# Altium PCB broken_sodimm_dq_widths.PcbDoc (part 1 of 7)
Units mm, origin at the board's own origin, x right, y up, seen from the top; angles counter-clockwise.
Board outline 69.63 x 30.03 mm, 8 copper layers (TOP, SPLIT2, S3, VDD4, S5, S6, SPLIT7, BOTTOM), stack 1.2 mm thick; 199 components, 229 nets, 1321 pads, 785 vias.
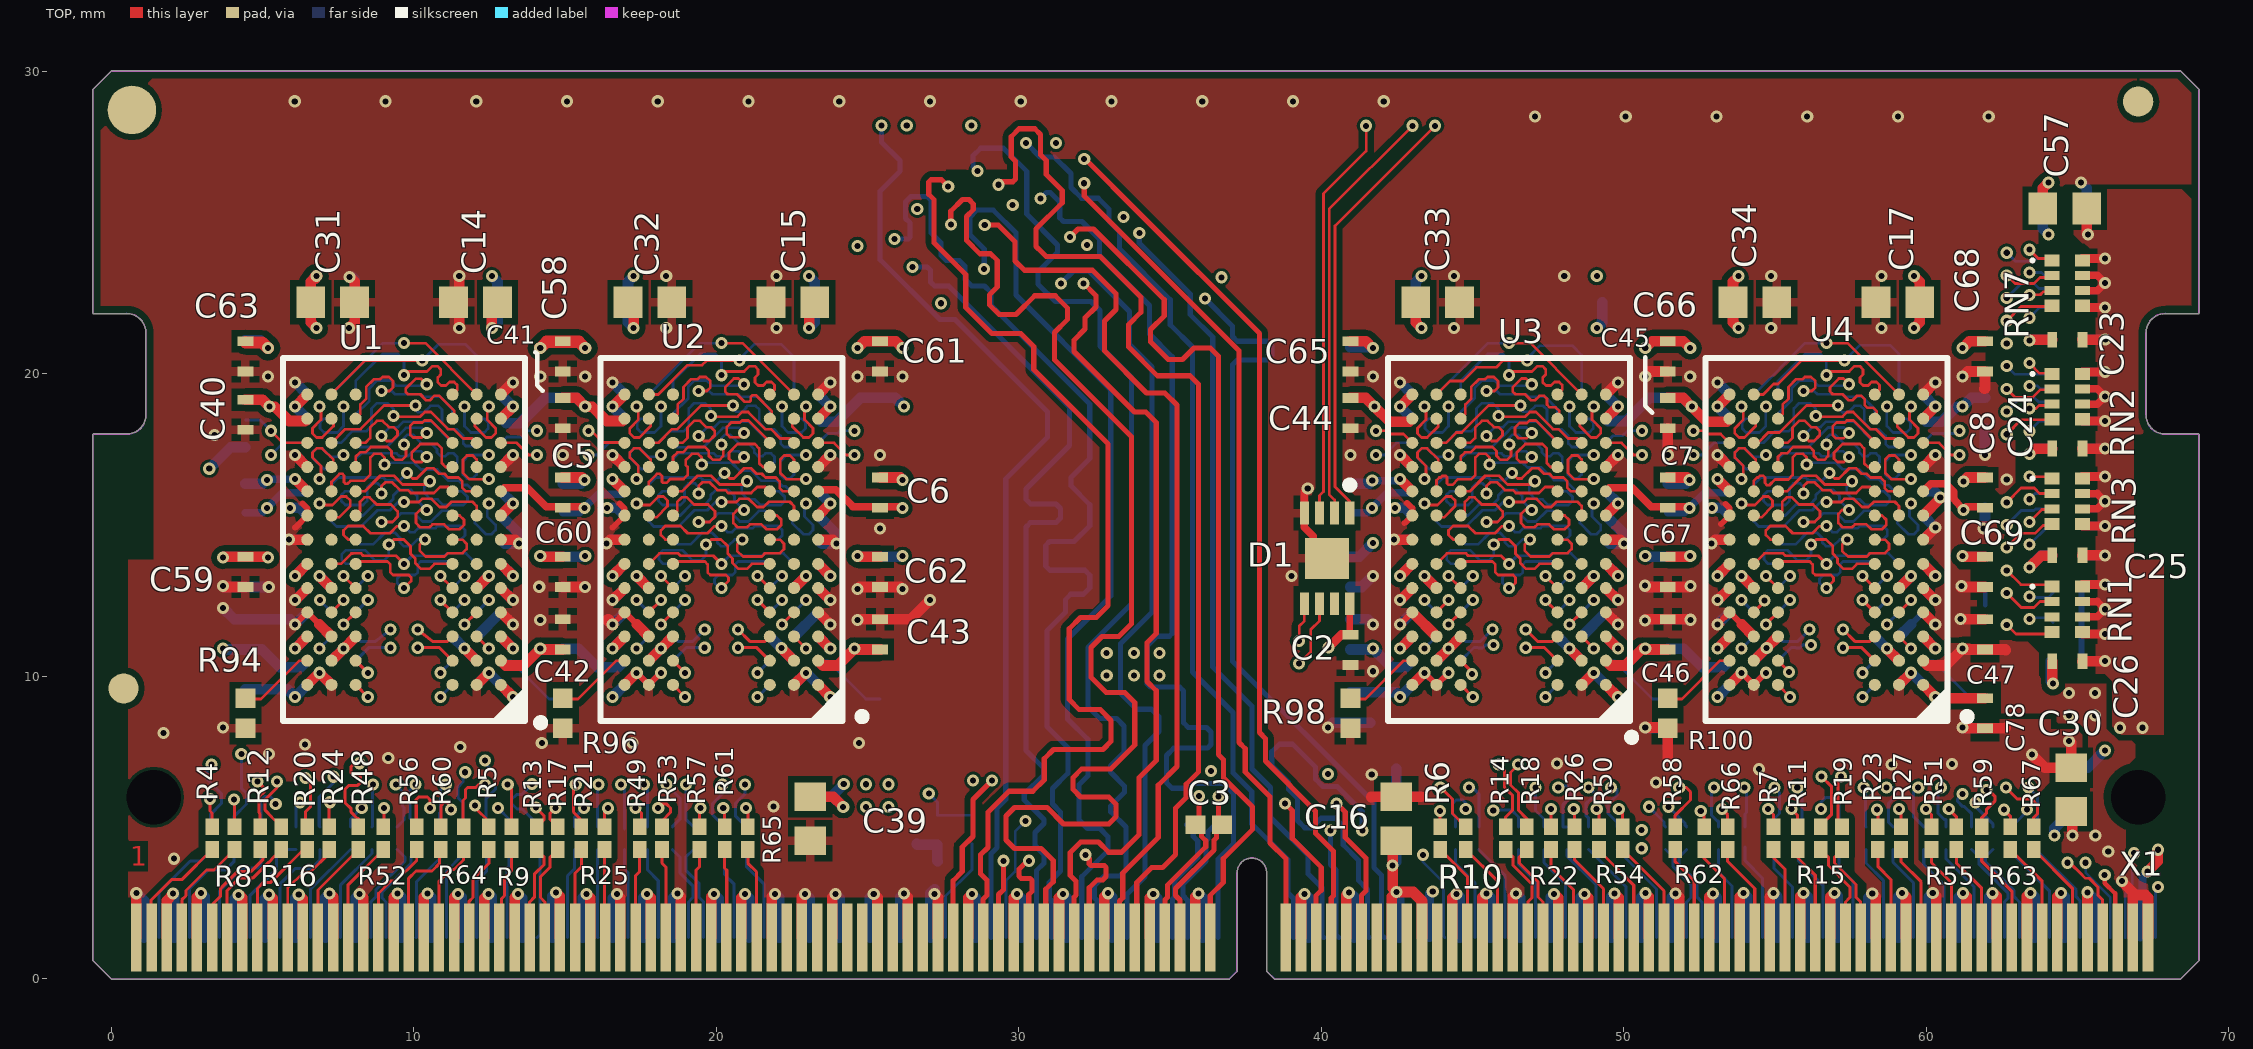
[diagram p0: TOP view]
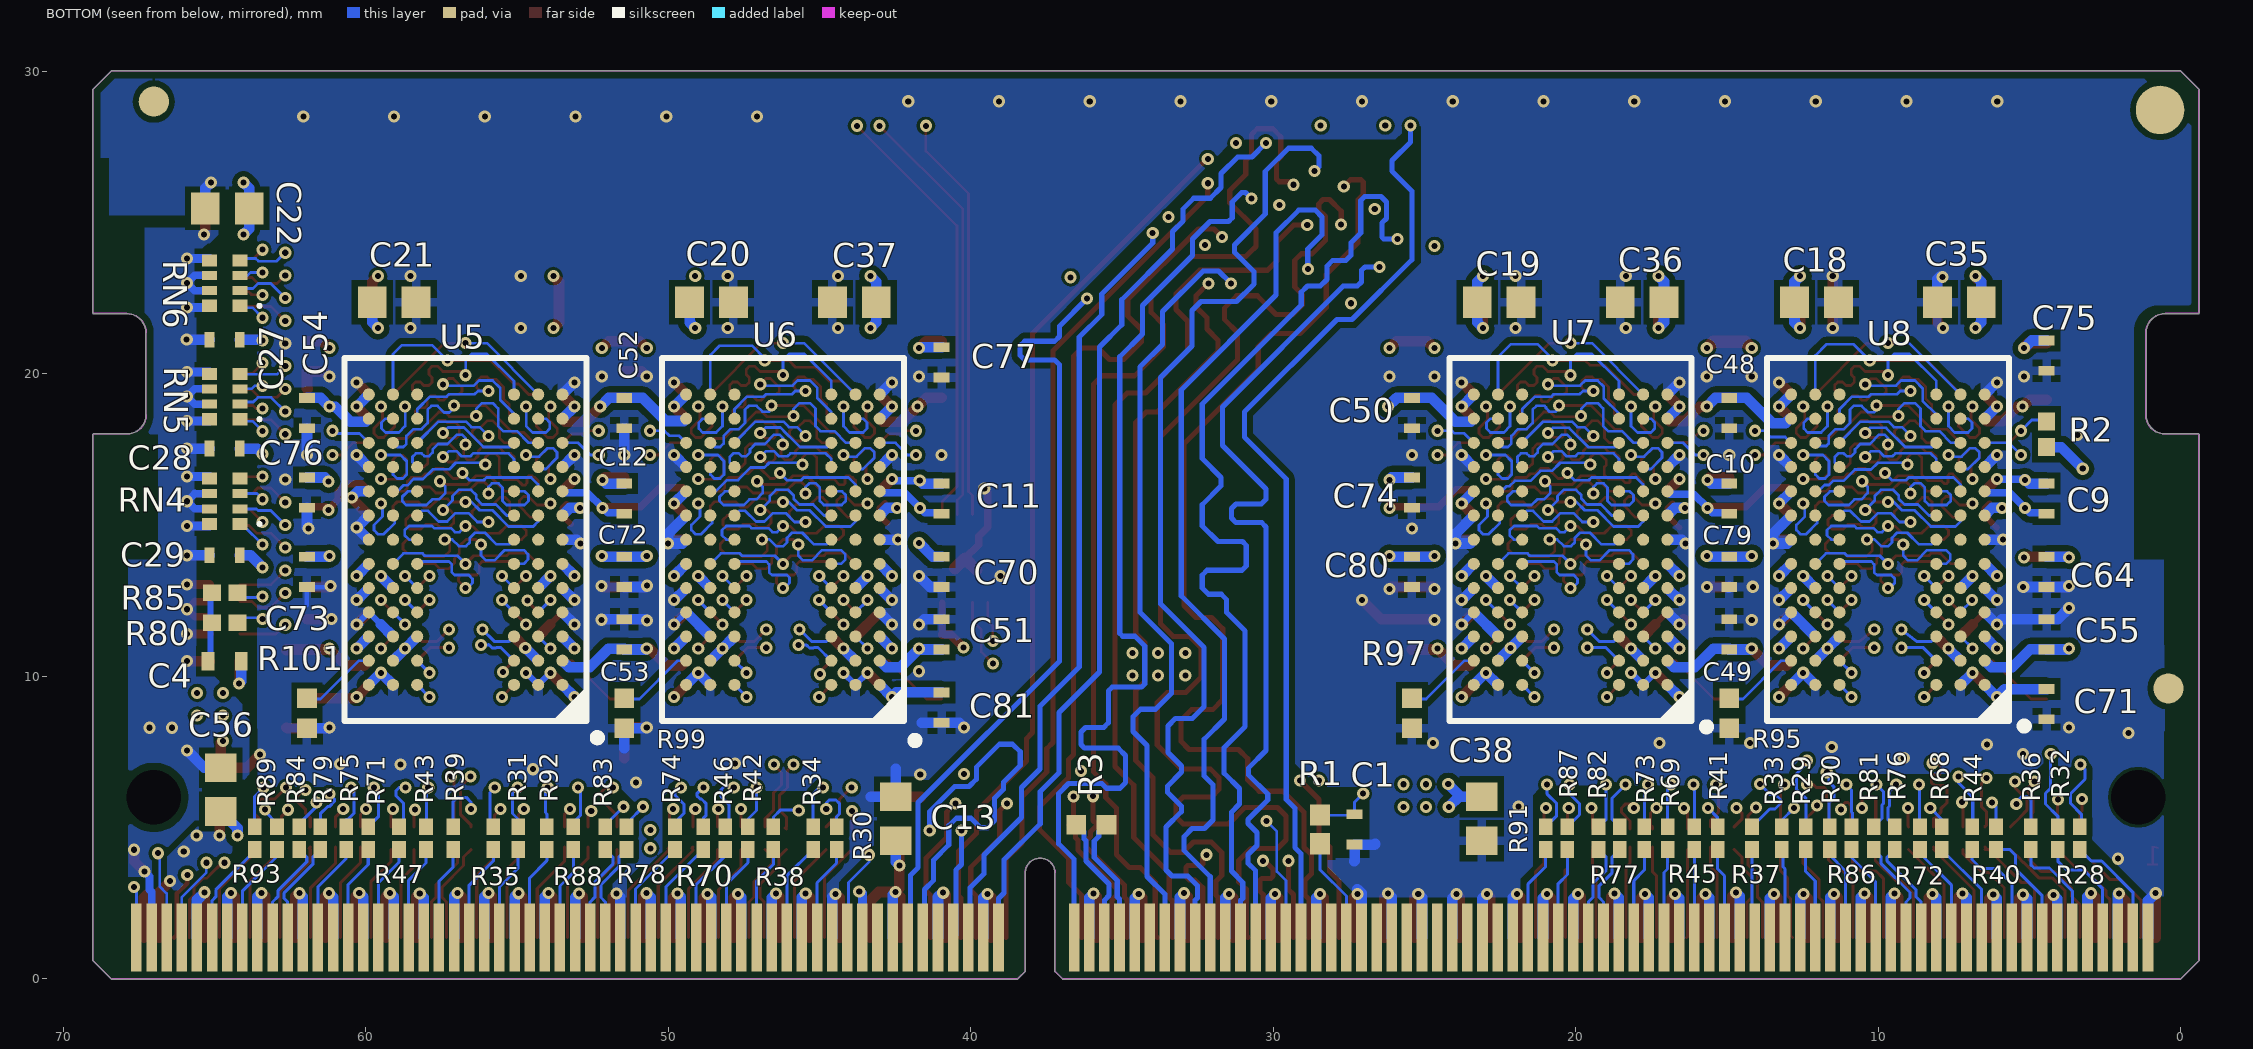
[diagram p1: BOTTOM view, seen from below]
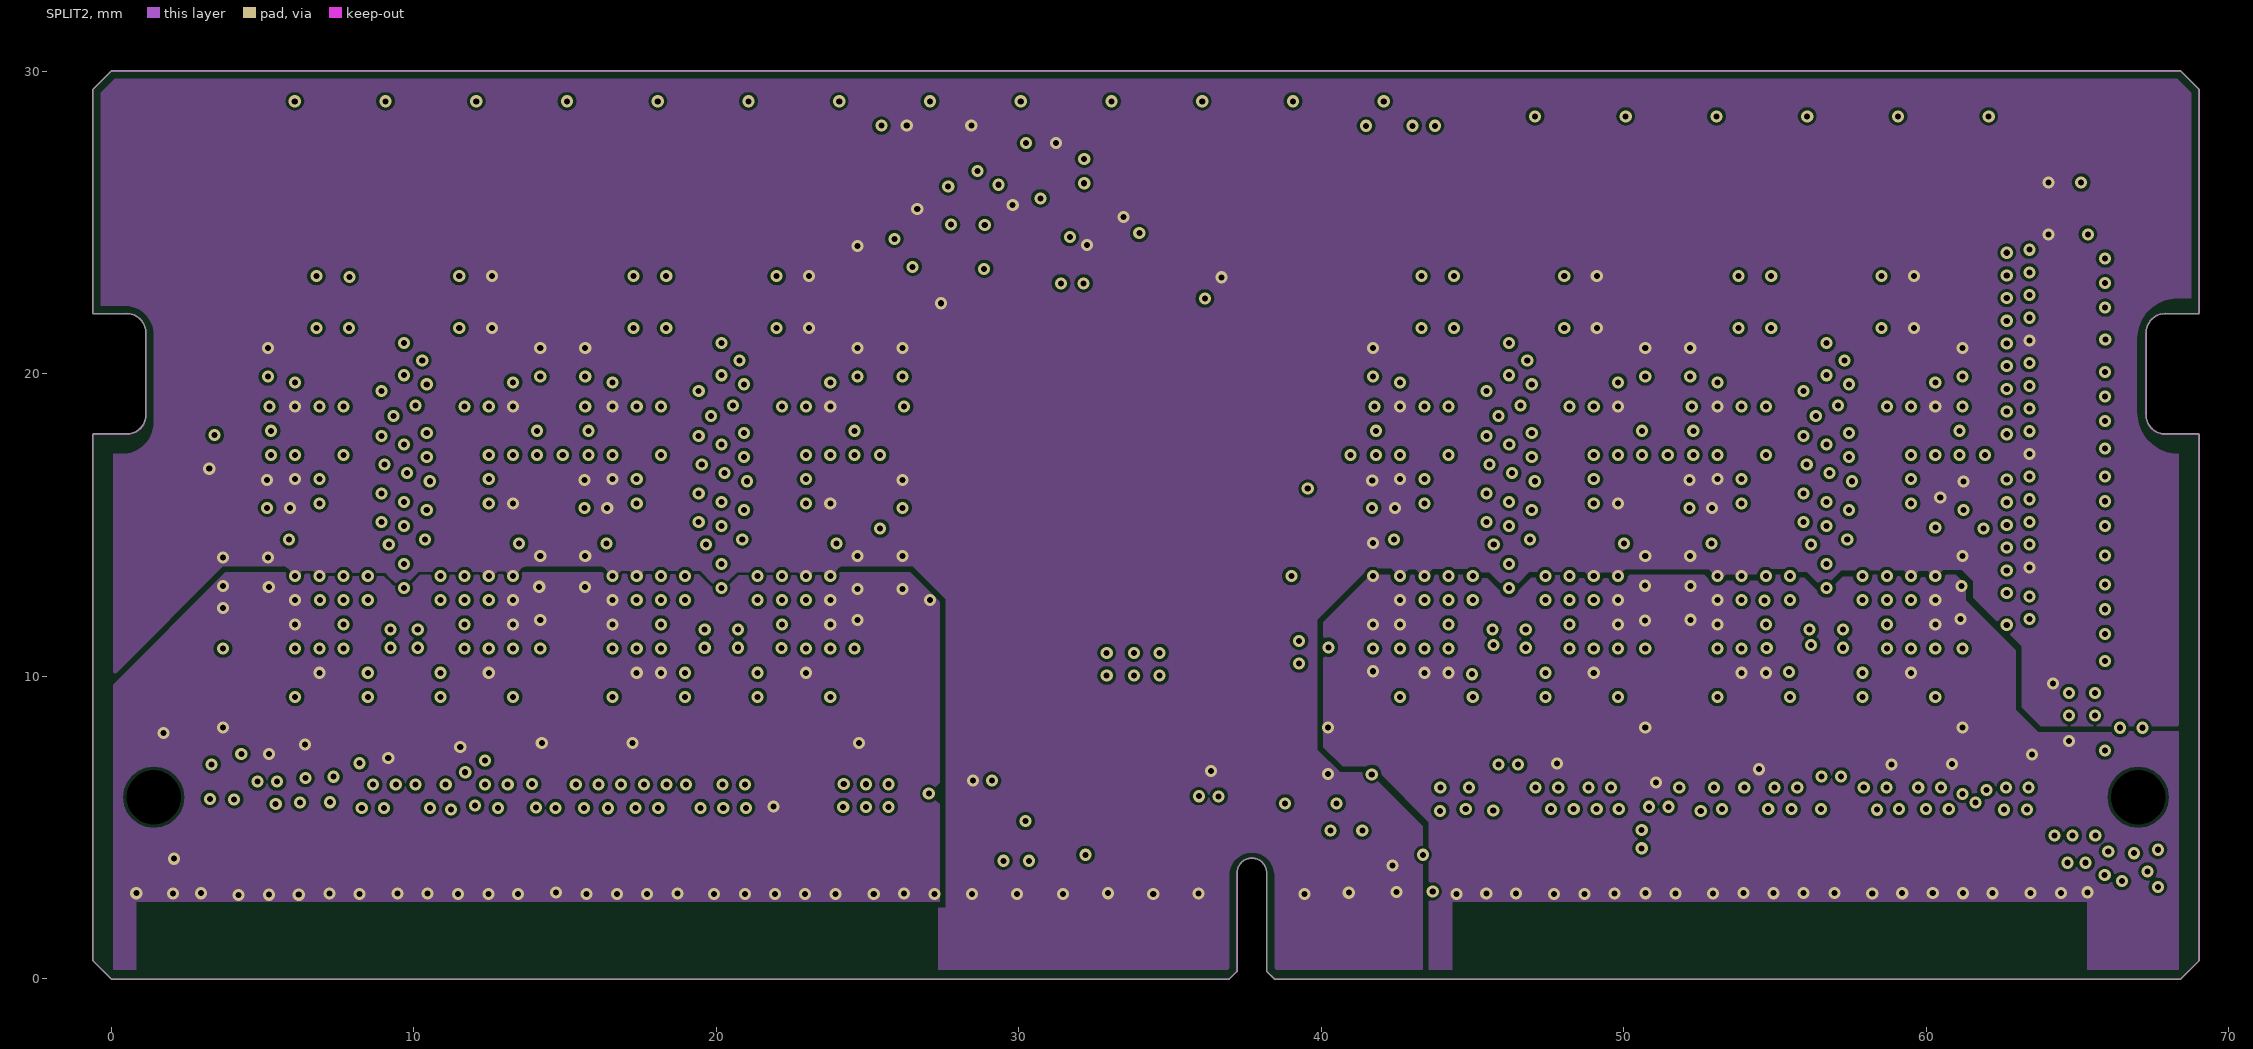
[diagram p2: SPLIT2]
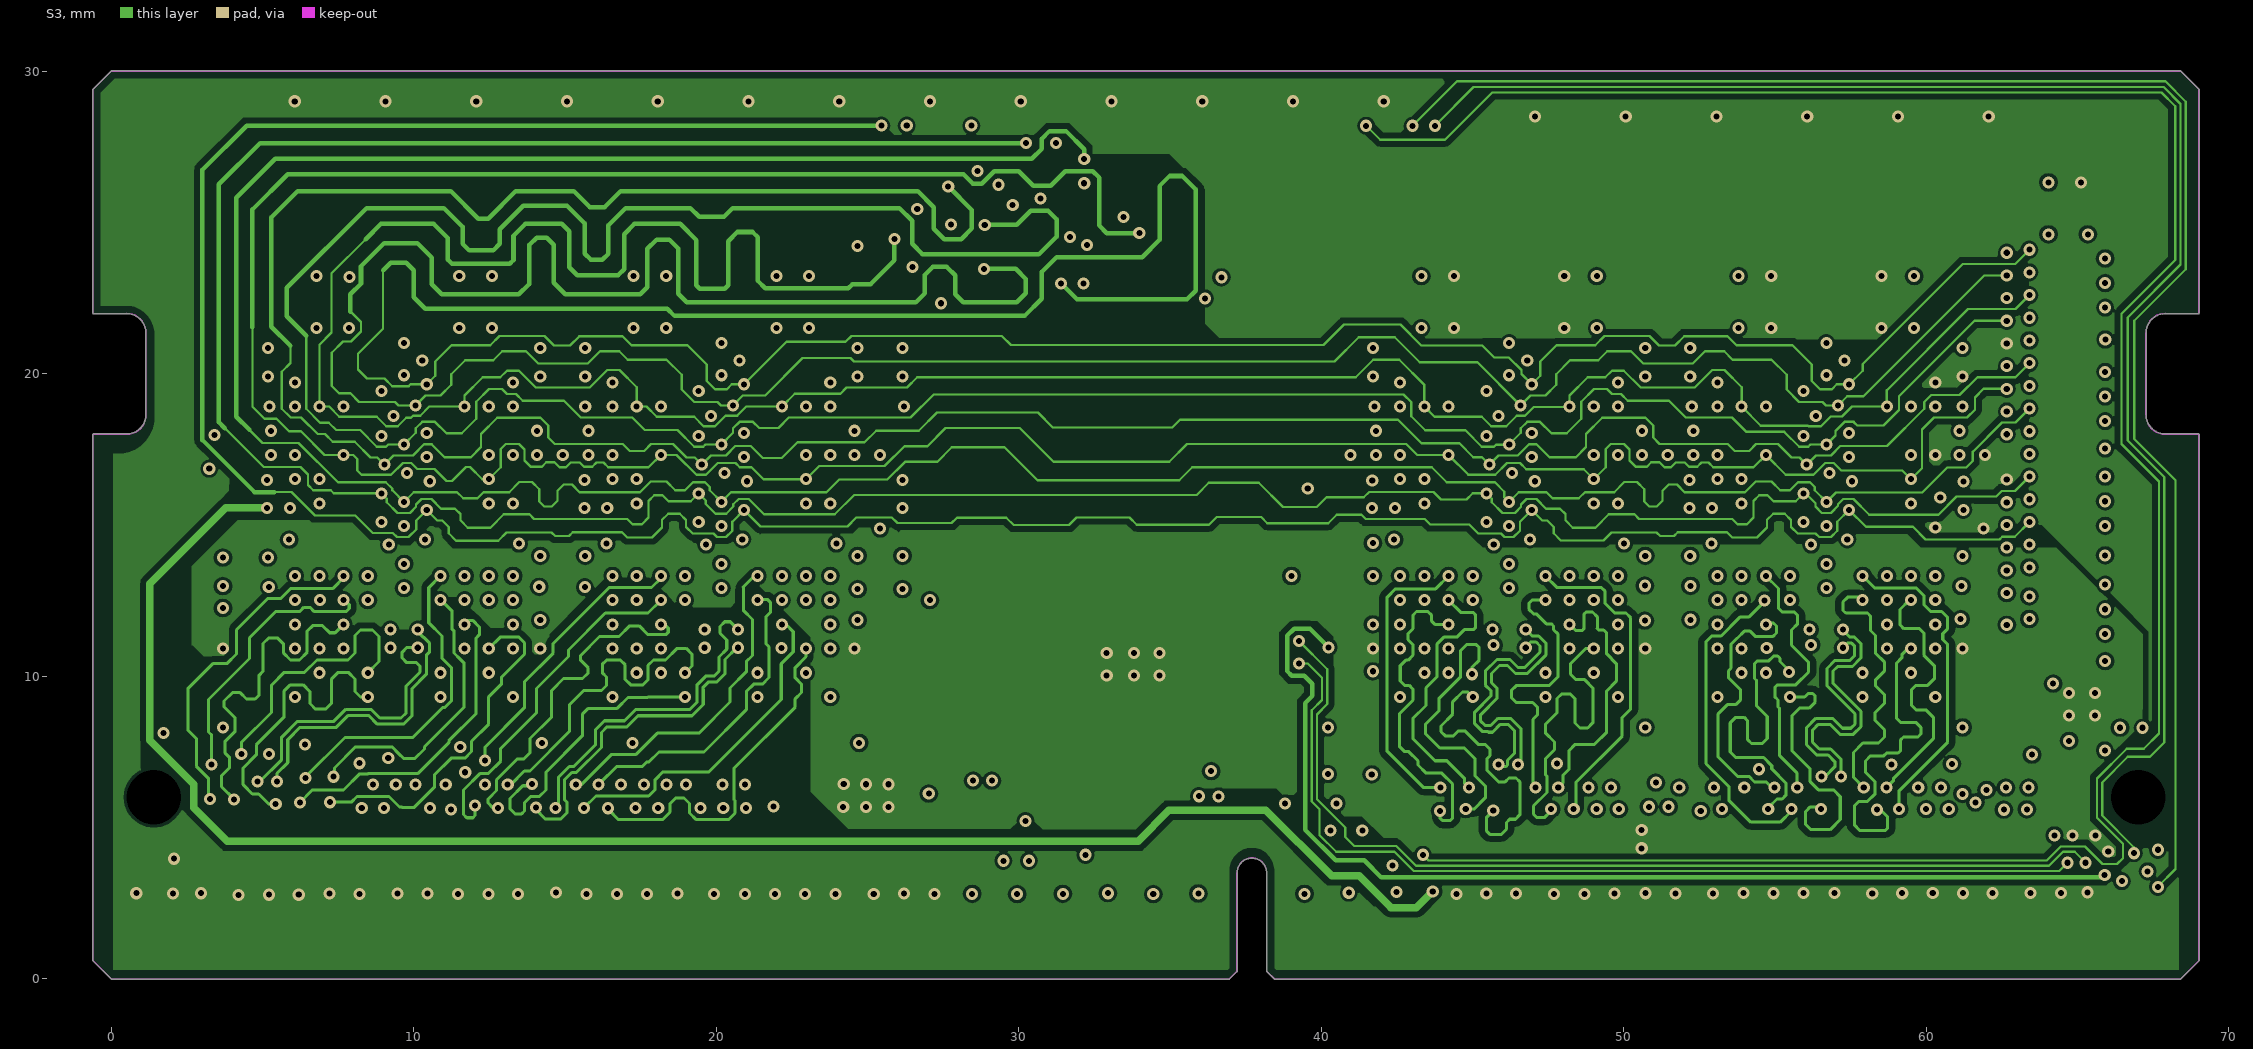
[diagram p3: S3]
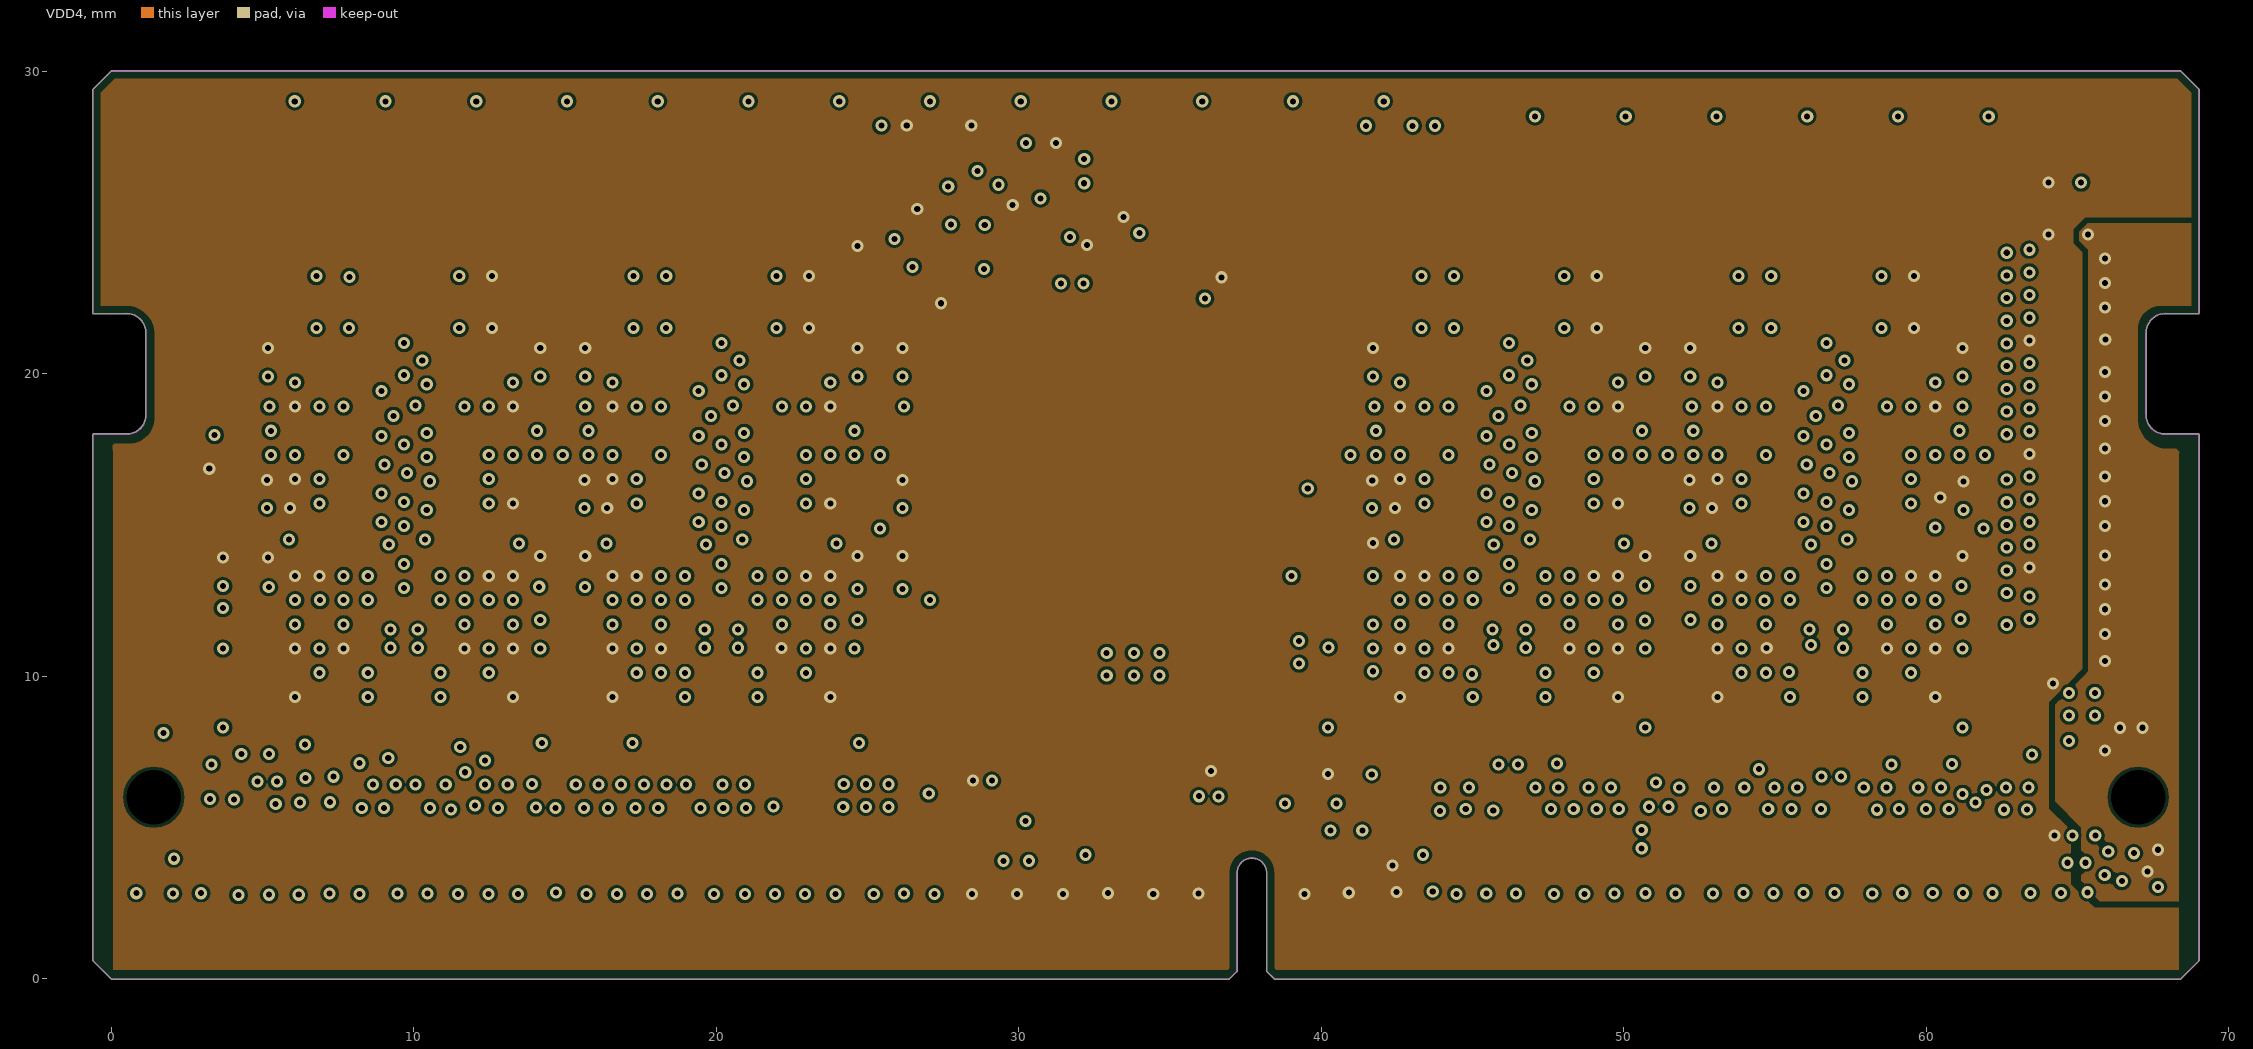
[diagram p4: VDD4]
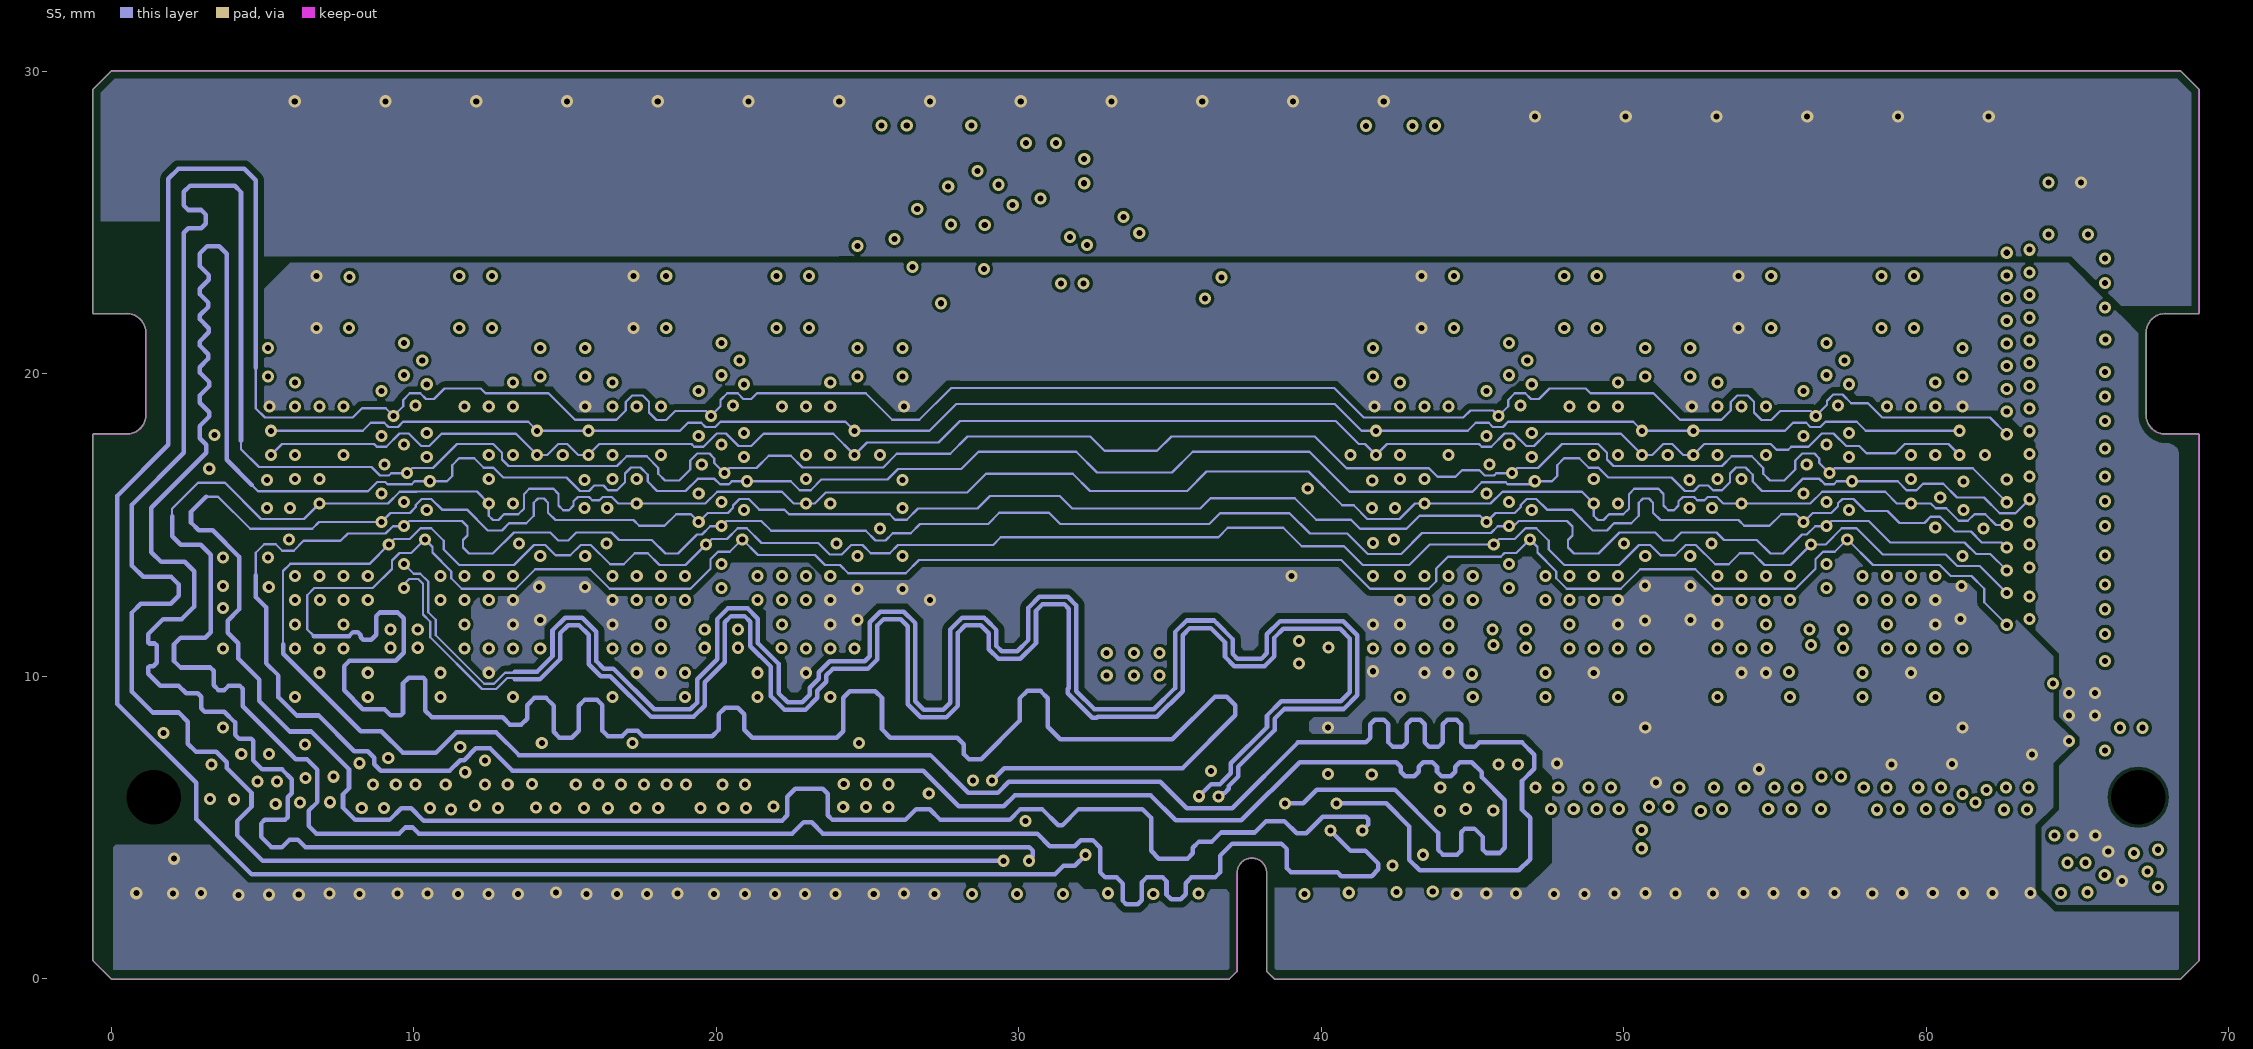
[diagram p5: S5]
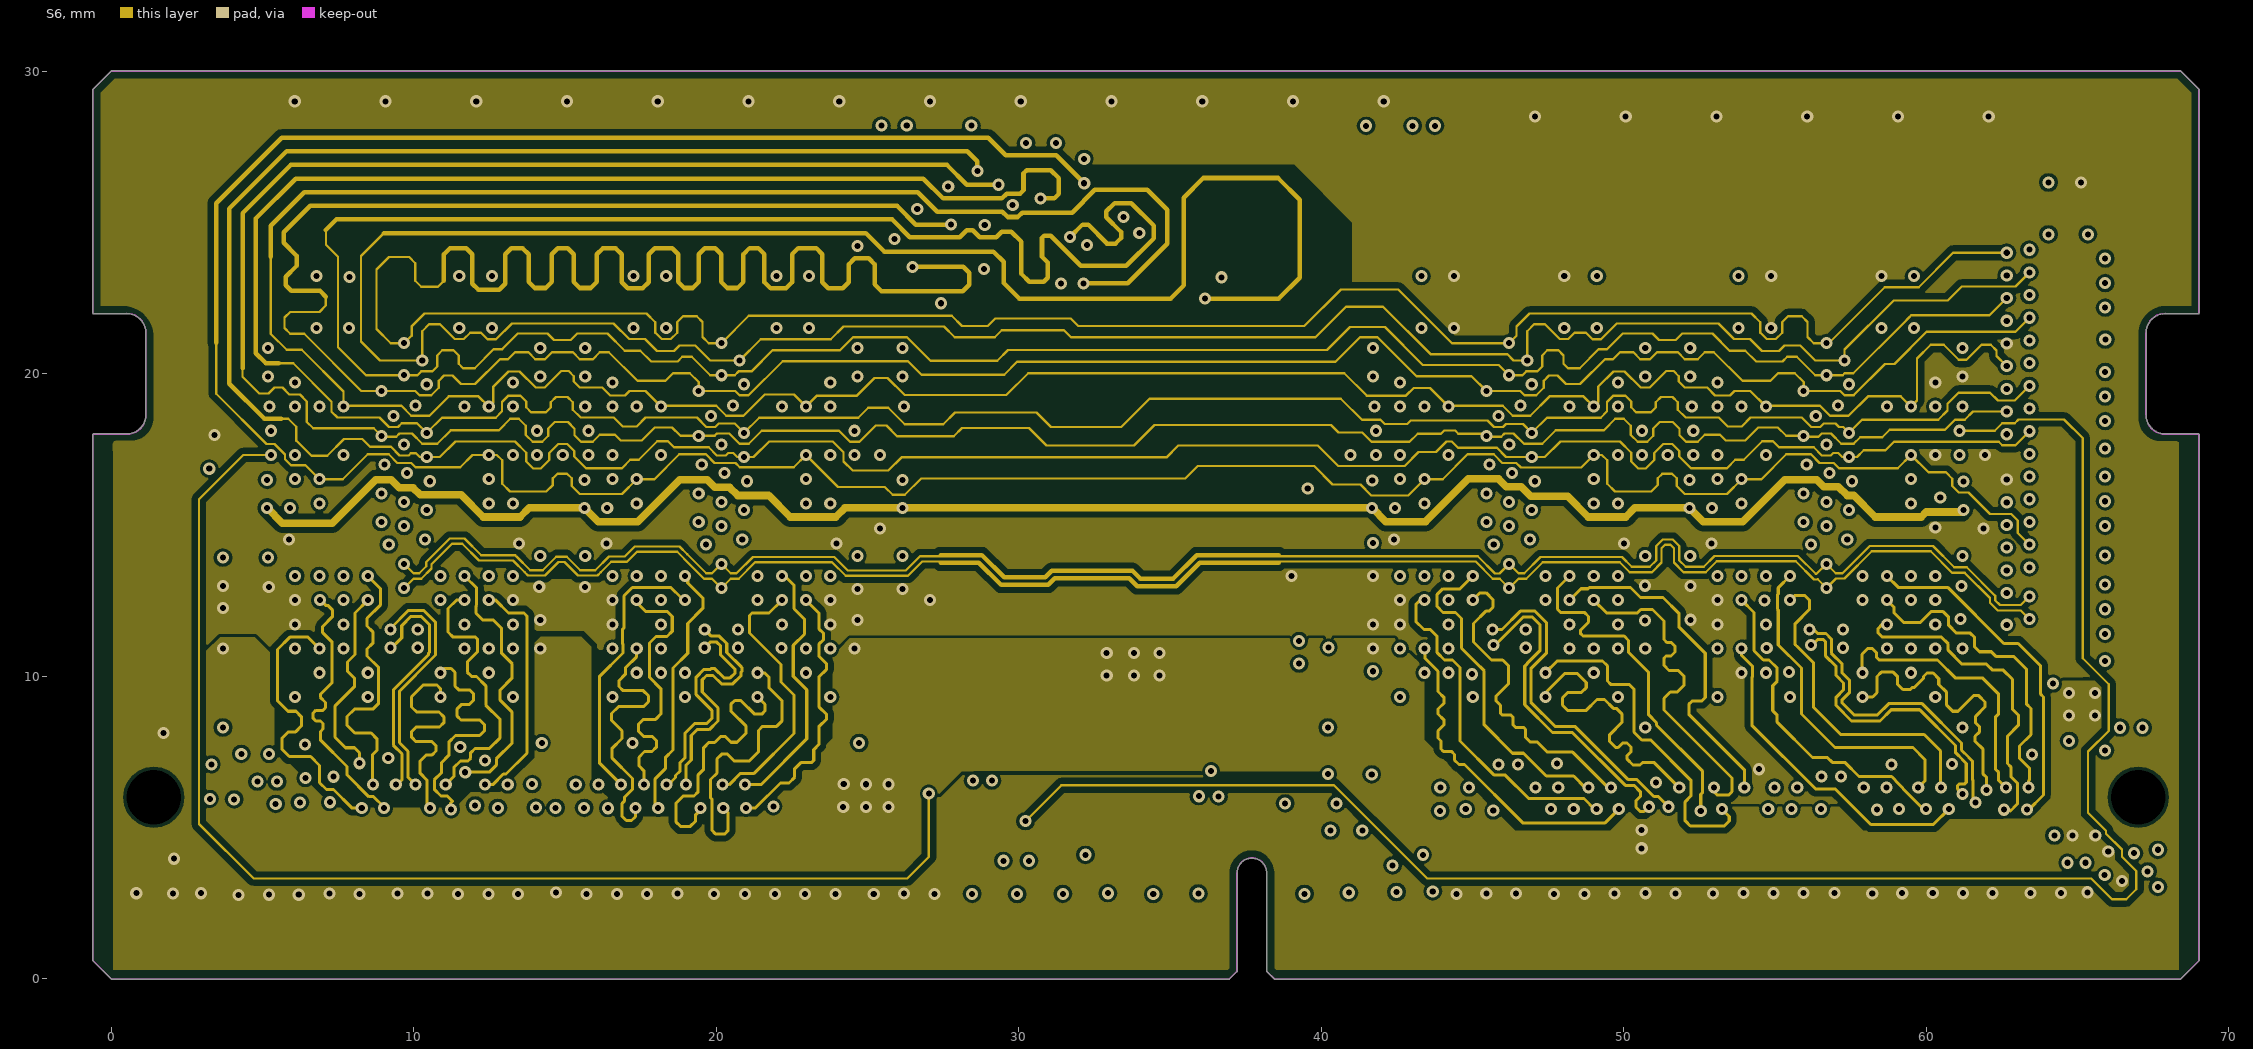
[diagram p6: S6]
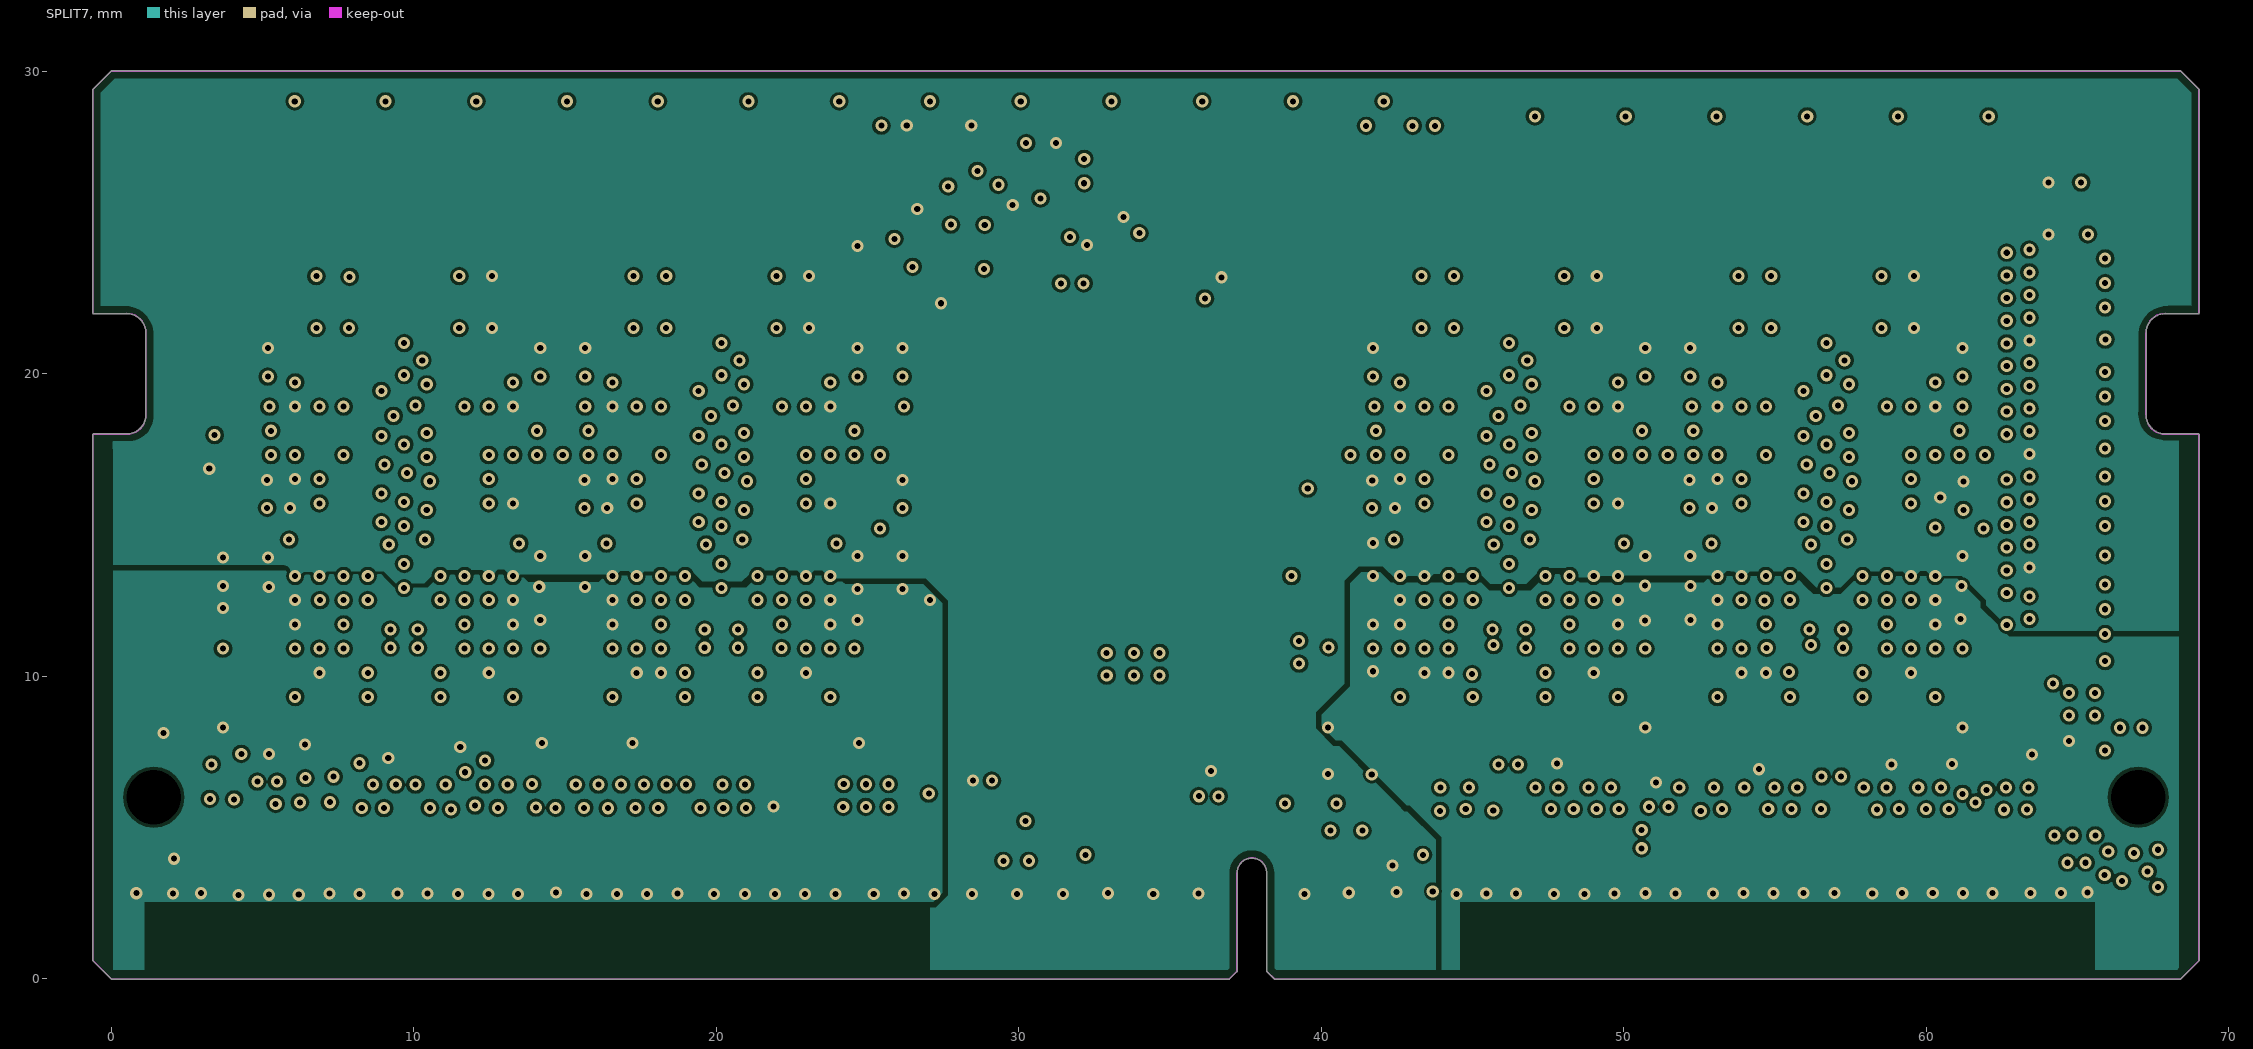
[diagram p7: SPLIT7]
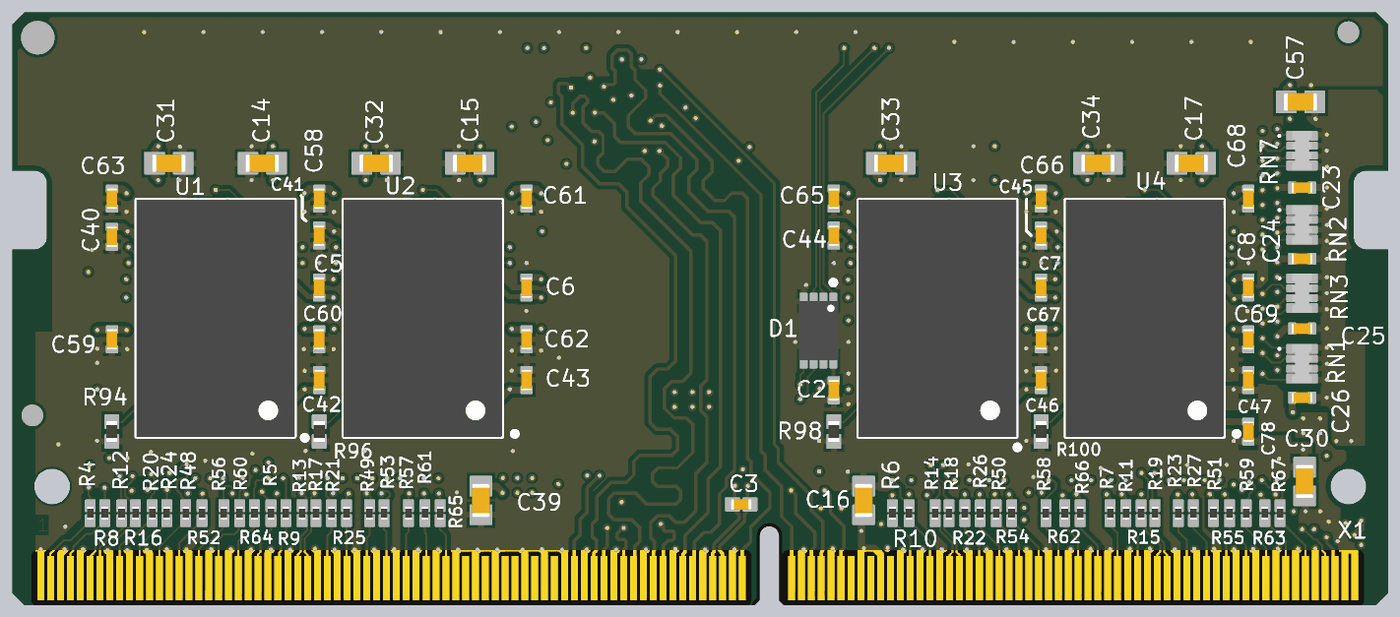
[diagram p13: 3D render of the assembled board from above, using the file's embedded part models]
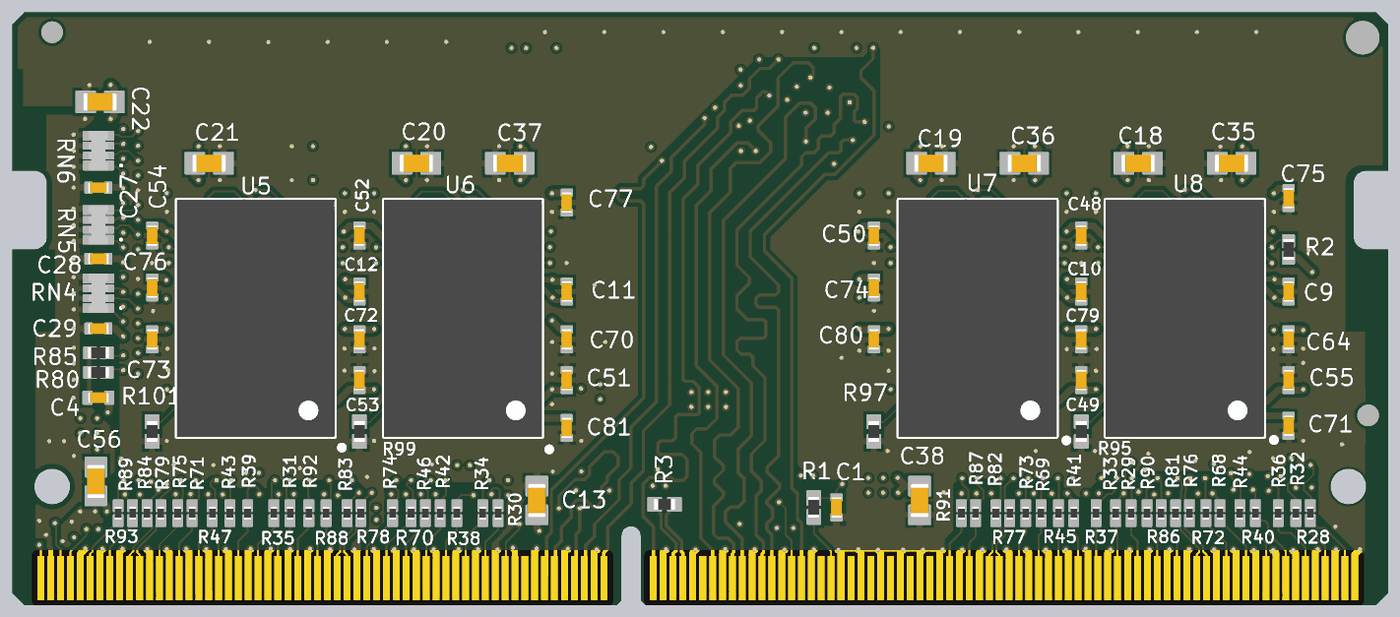
[diagram p14: 3D render of the assembled board from below, using the file's embedded part models]

## Layer stack, top to bottom
Top Solder: solder mask 0.01, Solder Resist, Dk 3.5
TOP: signal copper 0.045
Dielectric 1: core 0.07, FR-4, Dk 4.2
SPLIT2: signal copper 0.015
Dielectric2: core 0.08, FR-4, Dk 4.2
S3: signal copper 0.015
Dielectric3: core 0.32, FR-4, Dk 4.2
VDD4: signal copper 0.015
Dielectric4: core 0.08, FR-4, Dk 4.2
S5: signal copper 0.015
Dielectric5: core 0.32, FR-4, Dk 4.2
S6: signal copper 0.015
Dielectric6: core 0.08, FR-4, Dk 4.2
SPLIT7: signal copper 0.015
Dielectric7: core 0.07, FR-4, Dk 4.2
BOTTOM: signal copper 0.045
Bottom Solder: solder mask 0.01, Solder Resist, Dk 3.5

## Board outline
-0.613,0.6 -0.609,0.591 -0.009,-0.009 0,-0.013 36.95,-0.013 36.959,-0.009 37.209,0.241 37.213,0.25 37.213,3.5 cw(c37.7,3.5) 38.187,3.5 38.187,0.25 38.191,0.241 38.441,-0.009 38.45,-0.013 68.4,-0.013 68.409,-0.009 69.009,0.591 69.013,0.6 69.013,18 69,18.013 67.9,18.013 cw(c67.9,18.65) 67.263,18.65 67.263,21.35 cw(c67.9,21.35) 67.9,21.987 69,21.987 69.013,22 69.013,29.4 69.009,29.409 68.409,30.009 68.4,30.013 0,30.013 -0.009,30.009 -0.609,29.409 -0.613,29.4 -0.613,22 -0.6,21.987 0.5,21.987 cw(c0.5,21.35) 1.137,21.35 1.137,18.65 cw(c0.5,18.65) 0.5,18.013 -0.6,18.013 -0.613,18

## Design rules (kind name [scope] priority, off if disabled: settings)
Clearance Clearance_BL_min [WithinRoom('min0')or WithinRoom('min1')or WithinRoom('min3')or WithinRoom('min4')] p1: gap=0.1 ignorepadtopadclearanceinfootprint=FALSE except(0: Arc-Hole Track-Hole SMDPad-Hole THPad-Hole Via-Hole Fill-Hole Poly-Hole Region-Hole Text-Hole; 0.06: Track-Track; 0.2: Track-Poly SMDPad-Poly)
Clearance Clearance_Control [InNetClass('Control')] p2: gap=0.1 ignorepadtopadclearanceinfootprint=FALSE except(0: Arc-Hole Track-Hole SMDPad-Hole THPad-Hole Via-Hole Fill-Hole Poly-Hole Region-Hole Text-Hole; 0.2: Track-Poly SMDPad-Poly)
Clearance Clearance_BL [(InNetClass('BL0r') or InNetClass('BL1r') or InNetClass('BL2r') or InNetClass('BL3r') or InNetClass('BL4r') or InNetClass('BL5r') or InNetClass('BL6r') or InNetClass('BL7r'))] p3: gap=0.1 ignorepadtopadclearanceinfootprint=FALSE except(0: Arc-Hole Track-Hole SMDPad-Hole THPad-Hole Via-Hole Fill-Hole Poly-Hole Region-Hole Text-Hole; 0.06: Track-Track; 0.2: Track-Poly SMDPad-Poly)
Clearance Clearance_CLK [InNetClass('CLK')] p4: gap=0.1 ignorepadtopadclearanceinfootprint=FALSE except(0: Arc-Hole Track-Hole SMDPad-Hole THPad-Hole Via-Hole Fill-Hole Poly-Hole Region-Hole Text-Hole; 0.2: Track-Poly SMDPad-Poly)
Clearance "Clearance_Address and Comand" [InNetClass('Address and Comand (group1)') or InNetClass('Address and Comand (group2)')] p5: gap=0.1 ignorepadtopadclearanceinfootprint=FALSE except(0: Arc-Hole Track-Hole SMDPad-Hole THPad-Hole Via-Hole Fill-Hole Poly-Hole Region-Hole Text-Hole; 0.2: Track-Poly SMDPad-Poly)
Clearance [All] p6: gap=0.1 ignorepadtopadclearanceinfootprint=FALSE except(0: Arc-Hole Track-Hole SMDPad-Hole THPad-Hole Via-Hole Fill-Hole Poly-Hole Region-Hole Text-Hole; 0.2: Track-Poly SMDPad-Poly)
ComponentClearance [All] p1: gap=0.1 collisioncheckmode=3 verticalgap=0.1 showdistances=FALSE
DiffPairsRouting DiffPairsRouting_CKL [InDifferentialPairClass('CLK')] p1: maxlimit=0.1 minlimit=0.1 mostfreqgap=0.1 toplayer_minwidth=0.09 toplayer_maxwidth=0.17 toplayer_prefwidth=0.17 midlayer1_minwidth=0.075 midlayer1_maxwidth=0.17 midlayer1_prefwidth=0.15 midlayer2_minwidth=0.075 midlayer2_maxwidth=0.17 midlayer2_prefwidth=0.15 midlayer3_minwidth=0.075 midlayer3_maxwidth=0.17 midlayer3_prefwidth=0.15 midlayer4_minwidth=0.075 midlayer4_maxwidth=0.17 midlayer4_prefwidth=0.15 midlayer5_minwidth=0.075 midlayer5_maxwidth=0.17 midlayer5_prefwidth=0.15 midlayer6_minwidth=0.075 midlayer6_maxwidth=0.17 midlayer6_prefwidth=0.15 bottomlayer_minwidth=0.09 bottomlayer_maxwidth=0.17 bottomlayer_prefwidth=0.17 maxuncoupledlength=12.7
DiffPairsRouting DiffPairsRouting_DQS [InDifferentialPairClass('DQS')] p2: maxlimit=0.254 minlimit=0.1 mostfreqgap=0.1 toplayer_minwidth=0.1 toplayer_maxwidth=0.381 toplayer_prefwidth=0.1 midlayer1_minwidth=0.1 midlayer1_maxwidth=0.381 midlayer1_prefwidth=0.1 midlayer2_minwidth=0.1 midlayer2_maxwidth=0.381 midlayer2_prefwidth=0.1 midlayer3_minwidth=0.1 midlayer3_maxwidth=0.381 midlayer3_prefwidth=0.1 midlayer4_minwidth=0.1 midlayer4_maxwidth=0.381 midlayer4_prefwidth=0.1 midlayer5_minwidth=0.1 midlayer5_maxwidth=0.381 midlayer5_prefwidth=0.1 midlayer6_minwidth=0.1 midlayer6_maxwidth=0.381 midlayer6_prefwidth=0.1 bottomlayer_minwidth=0.1 bottomlayer_maxwidth=0.381 bottomlayer_prefwidth=0.1 maxuncoupledlength=12.7
MatchedLengths MatchedLengths_BL0 [InxSignalClass('xSignals_BL0')] p1: tolerance=0.1 checknetsindiffpair=FALSE checkdiffpairvsdiffpair=TRUE checkxsignals=TRUE checkothers=TRUE
MatchedLengths MatchedLengths_BL1 [InxSignalClass('xSignals_BL1')] p2: tolerance=0.1 checknetsindiffpair=FALSE checkdiffpairvsdiffpair=TRUE checkxsignals=TRUE checkothers=TRUE
MatchedLengths MatchedLengths_BL2 [InxSignalClass('xSignals_BL2')] p3: tolerance=0.1 checknetsindiffpair=FALSE checkdiffpairvsdiffpair=TRUE checkxsignals=TRUE checkothers=TRUE
MatchedLengths MatchedLengths_BL3 [InxSignalClass('xSignals_BL3')] p4: tolerance=0.1 checknetsindiffpair=FALSE checkdiffpairvsdiffpair=TRUE checkxsignals=TRUE checkothers=TRUE
MatchedLengths MatchedLengths_BL4 [InxSignalClass('xSignals_BL4')] p5: tolerance=0.1 checknetsindiffpair=FALSE checkdiffpairvsdiffpair=TRUE checkxsignals=TRUE checkothers=TRUE
MatchedLengths MatchedLengths_BL5 [InxSignalClass('xSignals_BL5')] p6: tolerance=0.1 checknetsindiffpair=FALSE checkdiffpairvsdiffpair=TRUE checkxsignals=TRUE checkothers=TRUE
MatchedLengths MatchedLengths_BL6 [InxSignalClass('xSignals_BL6')] p7: tolerance=0.1 checknetsindiffpair=FALSE checkdiffpairvsdiffpair=TRUE checkxsignals=TRUE checkothers=TRUE
MatchedLengths MatchedLengths_BL7 [InxSignalClass('xSignals_BL7')] p8: tolerance=0.1 checknetsindiffpair=FALSE checkdiffpairvsdiffpair=TRUE checkxsignals=TRUE checkothers=TRUE
MatchedLengths "MatchedLengths_Address and Comand (group2)_U9" [(InxSignalClass('xSignals_Address and Comand (group2)_P1_U9'))] p9: tolerance=1.5 checknetsindiffpair=FALSE checkdiffpairvsdiffpair=TRUE checkxsignals=TRUE checkothers=TRUE
MatchedLengths "MatchedLengths_Address and Comand (group2)_U1" [(InxSignalClass('xSignals_Address and Comand (group2)_P1_U1'))] p10: tolerance=1.5 checknetsindiffpair=FALSE checkdiffpairvsdiffpair=TRUE checkxsignals=TRUE checkothers=TRUE
MatchedLengths "MatchedLengths_Address and Comand (group2)_U2" [(InxSignalClass('xSignals_Address and Comand (group2)_P1_U2'))] p11: tolerance=1.5 checknetsindiffpair=FALSE checkdiffpairvsdiffpair=TRUE checkxsignals=TRUE checkothers=TRUE
MatchedLengths "MatchedLengths_Address and Comand (group2)_U8" [(InxSignalClass('xSignals_Address and Comand (group2)_P1_U8'))] p12: tolerance=1.5 checknetsindiffpair=FALSE checkdiffpairvsdiffpair=TRUE checkxsignals=TRUE checkothers=TRUE
MatchedLengths "MatchedLengths_Address and Comand (group2)_U7" [(InxSignalClass('xSignals_Address and Comand (group2)_P1_U7'))] p13: tolerance=1.5 checknetsindiffpair=FALSE checkdiffpairvsdiffpair=TRUE checkxsignals=TRUE checkothers=TRUE
MatchedLengths "MatchedLengths_Address and Comand (group2)_U4" [(InxSignalClass('xSignals_Address and Comand (group2)_P1_U4'))] p14: tolerance=1.5 checknetsindiffpair=FALSE checkdiffpairvsdiffpair=TRUE checkxsignals=TRUE checkothers=TRUE
MatchedLengths "MatchedLengths_Address and Comand (group2)_U6" [(InxSignalClass('xSignals_Address and Comand (group2)_P1_U6'))] p15: tolerance=1.5 checknetsindiffpair=FALSE checkdiffpairvsdiffpair=TRUE checkxsignals=TRUE checkothers=TRUE
MatchedLengths "MatchedLengths_Address and Comand (group2)_U5" [(InxSignalClass('xSignals_Address and Comand (group2)_P1_U5'))] p16: tolerance=1.5 checknetsindiffpair=FALSE checkdiffpairvsdiffpair=TRUE checkxsignals=TRUE checkothers=TRUE
MatchedLengths "MatchedLengths_Address and Comand (group1)_P1_U9" [(InxSignalClass('xSignals_Address and Comand (group1)_P1_U9')) or (InxSignalClass('xSignals_Control (group1)_P1_U9')) or (InxSignalClass('xSignals_CLK (group1)_P1_U9'))] p17: tolerance=0.03 checknetsindiffpair=FALSE checkdiffpairvsdiffpair=TRUE checkxsignals=TRUE checkothers=TRUE
MatchedLengths "MatchedLengths_Address and Comand (group1)_P1_U4" [(InxSignalClass('xSignals_Address and Comand (group1)_P1_U4')) or (InxSignalClass('xSignals_Control (group1)_P1_U4')) or (InxSignalClass('xSignals_CLK (group1)_P1_U4'))] p18: tolerance=2 checknetsindiffpair=FALSE checkdiffpairvsdiffpair=TRUE checkxsignals=TRUE checkothers=TRUE
MatchedLengths "MatchedLengths_Address and Comand (group1)_P1_U7" [(InxSignalClass('xSignals_Address and Comand (group1)_P1_U7')) or (InxSignalClass('xSignals_Control (group1)_P1_U7')) or (InxSignalClass('xSignals_CLK (group1)_P1_U7'))] p19: tolerance=0.03 checknetsindiffpair=FALSE checkdiffpairvsdiffpair=TRUE checkxsignals=TRUE checkothers=TRUE
MatchedLengths "MatchedLengths_Address and Comand (group1)_P1_U5" [(InxSignalClass('xSignals_Address and Comand (group1)_P1_U5')) or (InxSignalClass('xSignals_Control (group1)_P1_U5')) or (InxSignalClass('xSignals_CLK (group1)_P1_U5'))] p20: tolerance=2 checknetsindiffpair=FALSE checkdiffpairvsdiffpair=TRUE checkxsignals=TRUE checkothers=TRUE
MatchedLengths "MatchedLengths_Address and Comand (group1)_P1_U6" [(InxSignalClass('xSignals_Address and Comand (group1)_P1_U6')) or (InxSignalClass('xSignals_Control (group1)_P1_U6')) or (InxSignalClass('xSignals_CLK (group1)_P1_U6'))] p21: tolerance=0.03 checknetsindiffpair=FALSE checkdiffpairvsdiffpair=TRUE checkxsignals=TRUE checkothers=TRUE
MatchedLengths "MatchedLengths_Address and Comand (group1)_P1_U8" [(InxSignalClass('xSignals_Address and Comand (group1)_P1_U8')) or (InxSignalClass('xSignals_Control (group1)_P1_U8')) or (InxSignalClass('xSignals_CLK (group1)_P1_U8'))] p22: tolerance=0.03 checknetsindiffpair=FALSE checkdiffpairvsdiffpair=TRUE checkxsignals=TRUE checkothers=TRUE
MatchedLengths "MatchedLengths_Address and Comand (group1)_P1_U2" [(InxSignalClass('xSignals_Address and Comand (group1)_P1_U2')) or (InxSignalClass('xSignals_Control (group1)_P1_U2')) or (InxSignalClass('xSignals_CLK (group1)_P1_U2'))] p23: tolerance=2 checknetsindiffpair=FALSE checkdiffpairvsdiffpair=TRUE checkxsignals=TRUE checkothers=TRUE
MatchedLengths "MatchedLengths_Address and Comand (group1)_P1_U1" [(InxSignalClass('xSignals_Address and Comand (group1)_P1_U1')) or (InxSignalClass('xSignals_Control (group1)_P1_U1')) or (InxSignalClass('xSignals_CLK (group1)_P1_U1'))] p24: tolerance=2 checknetsindiffpair=FALSE checkdiffpairvsdiffpair=TRUE checkxsignals=TRUE checkothers=TRUE
MinimumSolderMaskSliver [All] p1: minsoldermaskwidth=0.05
PasteMaskExpansion [All] p1: expansion=0.05
PlaneClearance [All] p1: clearance=0.3
PlaneConnect [InNetClass('Power')] p1: planeconnectstyle=Relief reliefexpansion=0 reliefentries=4 reliefconductorwidth=0.3 reliefairgap=0.2
PolygonConnect Pad [IsPad And InAnyComponent] p1: connectstyle=Relief reliefconductorwidth=0.3 reliefentries=4 polygonreliefangle="90 Angle" airgapwidth=0.2
PolygonConnect all [All] p2: connectstyle=Direct reliefconductorwidth=0.254 reliefentries=4 polygonreliefangle="90 Angle" airgapwidth=0.254
RoutingVias [All] p1: holewidth=0.2 width=0.4 viastyle="Through Hole" minholewidth=0.2 minwidth=0.4 maxholewidth=0.2 maxwidth=0.4
SilkToSilkClearance [All] p1: silktosilkclearance=0.1
SilkToSolderMaskClearance [IsPad] p1: minsilkscreentomaskgap=0.05 clearancetoexposedcopper=FALSE
SolderMaskExpansion [All] p1: expansion=0.05 istentingtop=FALSE
Width Width_POWER [InNetClass('Power')] p1: maxlimit=0.4 minlimit=0.15 preferedwidth=0.35
Width "Width_Address and Comand" [InNetClass('Address and Comand (group1)') or InNetClass('Control')] p2: maxlimit=0.17 minlimit=0.075 preferedwidth=0.15 toplayer_minwidth=0.09 toplayer_prefwidth=0.17 bottomlayer_minwidth=0.09 bottomlayer_prefwidth=0.17 minimp=50.000000 maximp=50.000000 favimp=50.000000
Width Width_DQ [InNetClass('DQ')] p3: maxlimit=0.203 minlimit=0.165 preferedwidth=0.178
22 further rules are at their usual default settings.

## Classes and differential pairs
net class "Address and Command (group2)": A07 A08 A16 BA0 BA1
component class "Components Class 3": C4 C17 C29 C37 C46 C58 C67 C72
component class "Components Class 2": R1 R27 R33 R55 R59 R81 R84 R92
net class DQ: DM0 DM0R DM1 DM1R DM2 DM2R DM3 DM3R DM4 DM4R DM5 DM5R DM6 DM6R DM7 DM7R DQ00 DQ00R DQ01 DQ01R DQ02 DQ02R DQ03 DQ03R DQ04 DQ04R DQ05 DQ05R DQ06 DQ06R DQ07 DQ07R DQ08 DQ08R DQ09 DQ09R DQ10 DQ10R DQ11 DQ11R DQ12 DQ12R DQ13 DQ13R DQ14 DQ14R DQ15 DQ15R DQ16 DQ16R DQ17 DQ17R DQ18 DQ18R DQ19 DQ19R DQ20 DQ20R DQ21 DQ21R DQ22 DQ22R DQ23 DQ23R DQ24 DQ24R DQ25 DQ25R DQ26 DQ26R DQ27 DQ27R DQ28 DQ28R DQ29 DQ29R DQ30 DQ30R DQ31 DQ31R DQ32 DQ32R DQ33 DQ33R DQ34 DQ34R DQ35 DQ35R DQ36 DQ36R DQ37 DQ37R DQ38 DQ38R DQ39 DQ39R DQ40 DQ40R DQ41 DQ41R DQ42 DQ42R DQ43 DQ43R DQ44 DQ44R DQ45 DQ45R DQ46 DQ46R DQ47 DQ47R DQ48 DQ48R DQ49 DQ49R DQ50 DQ50R DQ51 DQ51R DQ52 DQ52R DQ53 DQ53R DQ54 DQ54R DQ55 DQ55R DQ56 DQ56R DQ57 DQ57R DQ58 DQ58R DQ59 DQ59R DQ60 DQ60R DQ61 DQ61R DQ62 DQ62R DQ63 DQ63R DQS0_N DQS0_P DQS0R_N DQS0R_P DQS1_N DQS1_P DQS1R_N DQS1R_P DQS2_N DQS2_P DQS2R_N DQS2R_P DQS3_N DQS3_P DQS3R_N DQS3R_P DQS4_N DQS4_P DQS4R_N DQS4R_P DQS5_N DQS5_P DQS5R_N DQS5R_P DQS6_N DQS6_P DQS6R_N DQS6R_P DQS7_N DQS7_P DQS7R_N DQS7R_P
differential pair class DQS: DQS0 DQS0R DQS1 DQS1R DQS2 DQS2R DQS3 DQS3R DQS4 DQS4R DQS5 DQS5R DQS6 DQS6R DQS7 DQS7R
net class Control: CKE0 ODT0 S0
net class CLK: CK0_N CK0_P
net class "Address and Command (group1)": A00 A01 A02 A03 A04 A05 A06 A09 A10 A11 A12 A13 A14 A15 ACT BG0 BG1 PARITY
net class BL7: DM7 DQ56 DQ57 DQ58 DQ59 DQ60 DQ61 DQ62 DQ63 DQS1R_N DQS7_N DQS7_P
net class BL6: DM6 DQ48 DQ49 DQ50 DQ51 DQ52 DQ53 DQ54 DQ55 DQS6_N DQS6_P
net class BL5: DM5 DQ40 DQ41 DQ42 DQ43 DQ44 DQ45 DQ46 DQ47 DQS5_N DQS5_P
net class BL4: DM4 DQ32 DQ33 DQ34 DQ35 DQ36 DQ37 DQ38 DQ39 DQ43 DQS4_N DQS4_P
net class BL3: DM3 DQ24 DQ25 DQ26 DQ27 DQ28 DQ29 DQ30 DQ31 DQS3_N DQS3_P
net class BL2: DM2 DQ16 DQ17 DQ18 DQ19 DQ20 DQ21 DQ22 DQ23 DQS2_N DQS2_P
net class BL1: DM1 DQ08 DQ09 DQ10 DQ11 DQ12 DQ13 DQ14 DQ15 DQS1_N DQS1_P
net class BL0: DM0 DQ00 DQ01 DQ02 DQ03 DQ04 DQ05 DQ06 DQ07 DQS0_N DQS0_P
net class Power: GND VDD VDDSPD VPP VREFCA VTT
component class Sheet5: C1 C3 C4 C5 C6 C7 C8 C9 C10 C11 C12 C13 C15 C16 C17 C18 C19 C20 C21 C22 C23 C24 C25 C26 C27 C28 C29 C30 C31 C32 C33 C34 C35 C37 C38 C39 C40 C41 C42 C43 C45 C46 C47 C48 C49 C50 C51 C52 C54 C55 C56 C57 C58 C59 C60 C61 C62 C63 C64 C65 C66 C67 C68 C70 C71 C72 C73 C74 C75 C76 C77 C78 C79 C80 C81
component class Sheet4: D1 R32 R40 R62 R101 U5 U6
component class Sheet3: R68 R72 R94 R97 U5 U6 U7 U8
component class Sheet2: C4 R1 R4 R5 R6 R7 R8 R9 R10 R11 R12 R13 R14 R15 R16 R17 R18 R19 R20 R21 R22 R23 R24 R25 R26 R27 R29 R30 R31 R33 R34 R35 R36 R37 R38 R39 R40 R41 R42 R43 R45 R46 R47 R48 R49 R50 R51 R52 R53 R54 R55 R56 R57 R58 R59 R60 R61 R62 R63 R64 R65 R66 R67 R68 R69 R70 R71 R72 R73 R74 R75 R77 R78 R79 R80 R81 R82 R83 R84 R85 R86 R87 R88 R89 R90 R91 R92 R93 R97 R101 RN1 RN2 RN3 RN4 RN5 RN6 RN7
component class Sheet1: C3 C5 C31 D1 R1 R40 R68 X1
net class BL0r: DM0R DQ00R DQ01R DQ02R DQ03R DQ04R DQ05R DQ06R DQ07R DQS0R_N DQS0R_P
net class BL1r: DM1R DQ08R DQ09R DQ10R DQ11R DQ12R DQ13R DQ14R DQ15R DQS1R_N DQS1R_P
net class BL2r: DM2R DQ16R DQ17R DQ18R DQ19R DQ20R DQ21 DQ21R DQ22R DQ23R DQS2R_N DQS2R_P
net class BL3r: DM3 DQ24R DQ25R DQ26R DQ27R DQ28R DQ29R DQ30R DQ31R DQS3R_N DQS3R_P
net class BL4r: DM4R DQ32R DQ33R DQ34R DQ35R DQ36R DQ37R DQ38R DQ39R DQS4R_N DQS4R_P
net class BL5r: DM5R DQ40R DQ41R DQ42R DQ43R DQ44R DQ45R DQ46R DQ47R DQS5R_N DQS5R_P
net class BL6r: DM6R DQ48R DQ49R DQ50R DQ51R DQ52R DQ53R DQ54R DQ55R DQS6R_N DQS6R_P
net class BL7r: DM7R DQ56R DQ57R DQ58R DQ59R DQ60R DQ61R DQ62R DQ63R DQS7R_N DQS7R_P
component class "Components Class 1": R5 R8 R9 R12 R13 R16 R17 R20 R21 R24 R25 R29 R32 R33 R34 R37 R39 R40 R41 R46 R55 R56 R60 R61 R62 R65 R68 R69 R72 R77 R81 R82 R85 R86 R87 R89 R90 R91 R92 R97 R99 R101
differential pair class CLK: CK0 CK1
differential pair DQS7: +DQS7_P -DQS7_N
differential pair DQS7R: +DQS7R_P -DQS7R_N
differential pair DQS6: +DQS6_P -DQS6_N
differential pair DQS6R: +DQS6R_P -DQS6R_N
differential pair DQS5: +DQS5_P -DQS5_N
differential pair DQS5R: +DQS5R_P -DQS5R_N
differential pair DQS4: +DQS4_P -DQS4_N
differential pair DQS4R: +DQS4R_P -DQS4R_N
differential pair DQS3: +DQS3_P -DQS3_N
differential pair DQS3R: +DQS3R_P -DQS3R_N
differential pair DQS2: +DQS2_P -DQS2_N
differential pair DQS2R: +DQS2R_P -DQS2R_N
differential pair DQS1: +DQS1_P -DQS1_N
differential pair DQS1R: +DQS1R_P -DQS1R_N
differential pair DQS0: +DQS0_P -DQS0_N
differential pair DQS0R: +DQS0R_P -DQS0R_N
differential pair CK1: +CK1_P -CK1_N
differential pair CK0: +CK0_P -CK0_N

## Components (designator, comment, footprint, x,y, rotation, side; value= is the part's Value field where it differs from the comment)
C1 "C1005C0G1H101K050BA" CAPC1005X55X10LL05 27.305,4.937 r270 bottom
C2 "C1005X7R1E104M" CAPC1005X55X10LL05 40.958,10.875 r90 top
C3 "GRM1555C1H3R3CA01D" CAPC1005X55X25NL5T10 36.275,5.093 r0 top
C4 "C1005X7R1E103M050BB" CAPC1005X55X10NL05 64.657,10.5 r180 bottom
C5 "C1005X7R1E104M" CAPC1005X55X10LL05 14.918,16.072 r270 top
C6 "C1005X7R1E104M" CAPC1005X55X10LL05 25.408,16.072 r270 top
C7 "C1005X7R1E104M" CAPC1005X55X10LL05 51.448,16.072 r270 top
C8 "C1005X7R1E104M" CAPC1005X55X10LL05 61.938,16.072 r270 top
C9 "C1005X7R1E104M" CAPC1005X55X10LL05 4.428,15.872 r270 bottom
C10 "C1005X7R1E104M" CAPC1005X55X10LL05 14.918,15.872 r270 bottom
C11 "C1005X7R1E104M" CAPC1005X55X10LL05 40.958,15.872 r270 bottom
C12 "C1005X7R1E104M" CAPC1005X55X10LL05 51.448,15.872 r270 bottom
C13 "GRM188R60J475KE19D" CAPC1608X90X35ML10T15 42.47,5.293 r270 bottom
C14 "GRM188R60J475KE19D" CAPC1608X90X35ML10T15 12.035,22.37 r0 top
C15 "GRM188R60J475KE19D" CAPC1608X90X35ML10T15 22.525,22.37 r0 top
C16 "GRM188R60J475KE19D" CAPC1608X90X35ML10T15 42.47,5.293 r270 top
C17 "GRM188R60J475KE19D" CAPC1608X90X35ML10T15 59.055,22.37 r0 top
C18 "GRM188R60J475KE19D" CAPC1608X90X35ML10T15 12.035,22.37 r0 bottom
C19 "GRM188R60J475KE19D" CAPC1608X90X35ML10T15 22.525,22.37 r0 bottom
C20 "GRM188R60J475KE19D" CAPC1608X90X35ML10T15 48.565,22.37 r0 bottom
C21 "GRM188R60J475KE19D" CAPC1608X90X35ML10T15 59.055,22.37 r0 bottom
C22 "GRM188R60J475KE19D" CAPC1608X90X35ML10T15 64.574,25.469 r180 bottom
C23 "CGB2A1X5R1E105K033BC" CAPC1005X33X10LL5 64.657,21.13 r0 top
C24 "CGB2A1X5R1E105K033BC" CAPC1005X33X10LL5 64.657,17.53 r0 top
C25 "CGB2A1X5R1E105K033BC" CAPC1005X33X10LL5 64.657,14 r0 top
C26 "CGB2A1X5R1E105K033BC" CAPC1005X33X10LL5 64.657,10.5 r0 top
C27 "CGB2A1X5R1E105K033BC" CAPC1005X33X10LL5 64.657,21.13 r0 bottom
C28 "CGB2A1X5R1E105K033BC" CAPC1005X33X10LL5 64.657,17.53 r0 bottom
C29 "CGB2A1X5R1E105K033BC" CAPC1005X33X10LL5 64.657,14 r0 bottom
C30 "GRM188R60J475KE19D" CAPC1608X90X35ML10T15 64.787,6.255 r270 top
C31 "GRM188R60J475KE19D" CAPC1608X90X35ML10T15 7.311,22.37 r180 top
C32 "GRM188R60J475KE19D" CAPC1608X90X35ML10T15 17.801,22.37 r180 top
C33 "GRM188R60J475KE19D" CAPC1608X90X35ML10T15 43.841,22.37 r180 top
C34 "GRM188R60J475KE19D" CAPC1608X90X35ML10T15 54.331,22.37 r180 top
C35 "GRM188R60J475KE19D" CAPC1608X90X35ML10T15 7.311,22.37 r180 bottom
C36 "GRM188R60J475KE19D" CAPC1608X90X35ML10T15 17.801,22.37 r180 bottom
C37 "GRM188R60J475KE19D" CAPC1608X90X35ML10T15 43.841,22.37 r180 bottom
C38 "GRM188R60J475KE19D" CAPC1608X90X35ML10T15 23.1,5.293 r90 bottom
C39 "GRM188R60J475KE19D" CAPC1608X90X35ML10T15 23.1,5.293 r90 top
C40 "CGB2A1X5R1E105K033BC" CAPC1005X33X10LL5 4.428,18.647 r90 top
C41 "CGB2A1X5R1E105K033BC" CAPC1005X33X10LL5 14.918,18.703 r90 top
C42 "CGB2A1X5R1E105K033BC" CAPC1005X33X10LL5 14.918,11.387 r270 top
C43 "CGB2A1X5R1E105K033BC" CAPC1005X33X10LL5 25.408,11.387 r270 top
C44 "CGB2A1X5R1E105K033BC" CAPC1005X33X10LL5 40.958,18.703 r90 top
C45 "CGB2A1X5R1E105K033BC" CAPC1005X33X10LL5 51.448,18.703 r90 top
C46 "CGB2A1X5R1E105K033BC" CAPC1005X33X10LL5 51.448,11.387 r270 top
C47 "CGB2A1X5R1E105K033BC" CAPC1005X33X10LL5 61.938,11.387 r270 top
C48 "CGB2A1X5R1E105K033BC" CAPC1005X33X10LL5 14.918,18.703 r90 bottom
C49 "CGB2A1X5R1E105K033BC" CAPC1005X33X10LL5 14.918,11.387 r270 bottom
C50 "CGB2A1X5R1E105K033BC" CAPC1005X33X10LL5 25.408,18.703 r90 bottom
C51 "CGB2A1X5R1E105K033BC" CAPC1005X33X10LL5 40.958,11.387 r270 bottom
C52 "CGB2A1X5R1E105K033BC" CAPC1005X33X10LL5 51.448,18.703 r90 bottom
C53 "CGB2A1X5R1E105K033BC" CAPC1005X33X10LL5 51.448,11.387 r270 bottom
C54 "CGB2A1X5R1E105K033BC" CAPC1005X33X10LL5 61.938,18.703 r90 bottom
C55 "CGB2A1X5R1E105K033BC" CAPC1005X33X10LL5 4.428,11.387 r270 bottom
C56 "GRM188R60J475KE19D" CAPC1608X90X35ML10T15 64.787,6.255 r90 bottom
C57 "GRM188R60J475KE19D" CAPC1608X90X35ML10T15 64.574,25.469 r0 top
C58 "CGB2A1X5R1E105K033BC" CAPC1005X33X10LL5 14.918,20.578 r90 top
C59 "CGB2A1X5R1E105K033BC" CAPC1005X33X10LL5 4.428,13.452 r90 top
C60 "CGB2A1X5R1E105K033BC" CAPC1005X33X10LL5 14.918,13.452 r90 top
C61 "CGB2A1X5R1E105K033BC" CAPC1005X33X10LL5 25.408,20.578 r90 top
C62 "CGB2A1X5R1E105K033BC" CAPC1005X33X10LL5 25.408,13.452 r90 top
C63 "CGB2A1X5R1E105K033BC" CAPC1005X33X10LL5 4.428,20.578 r90 top
C64 "CGB2A1X5R1E105K033BC" CAPC1005X33X10LL5 4.428,13.452 r90 bottom
C65 "CGB2A1X5R1E105K033BC" CAPC1005X33X10LL5 40.958,20.578 r90 top
C66 "CGB2A1X5R1E105K033BC" CAPC1005X33X10LL5 51.448,20.578 r90 top
C67 "CGB2A1X5R1E105K033BC" CAPC1005X33X10LL5 51.448,13.452 r90 top
C68 "CGB2A1X5R1E105K033BC" CAPC1005X33X10LL5 61.938,20.578 r90 top
C69 "CGB2A1X5R1E105K033BC" CAPC1005X33X10LL5 61.938,13.452 r90 top
C70 "CGB2A1X5R1E105K033BC" CAPC1005X33X10LL5 40.958,13.452 r90 bottom
C71 "CGB2A1X5R1E105K033BC" CAPC1005X33X10LL5 4.428,9.079 r90 bottom
C72 "CGB2A1X5R1E105K033BC" CAPC1005X33X10LL5 51.448,13.452 r90 bottom
C73 "CGB2A1X5R1E105K033BC" CAPC1005X33X10LL5 61.938,13.452 r90 bottom
C74 "CGB2A1X5R1E105K033BC" CAPC1005X33X10LL5 25.408,16.072 r90 bottom
C75 "CGB2A1X5R1E105K033BC" CAPC1005X33X10LL5 4.428,20.602 r90 bottom
C76 "CGB2A1X5R1E105K033BC" CAPC1005X33X10LL5 61.938,16.072 r90 bottom
C77 "CGB2A1X5R1E105K033BC" CAPC1005X33X10LL5 40.958,20.378 r90 bottom
C78 "CGB2A1X5R1E105K033BC" CAPC1005X33X10LL5 61.938,8.779 r90 top
C79 "CGB2A1X5R1E105K033BC" CAPC1005X33X10LL5 14.918,13.452 r90 bottom
C80 "CGB2A1X5R1E105K033BC" CAPC1005X33X10LL5 25.408,13.452 r90 bottom
C81 "CGB2A1X5R1E105K033BC" CAPC1005X33X10LL5 40.958,8.967 r90 bottom
D1 "MCP98244" MCHP-TDFN-MNY8_V 40.186,13.897 r270 top
R1 "RC0402JR-07120RL" RESC1005X40X25ML5T10 28.449,4.937 r90 bottom
R2 "RC0402JR-0739RL" RESC1005X40X25NL5T10 4.428,18.003 r270 bottom
R3 "ERJ-2GEJ750X" RESC1005X40X25ML05T05 36.007,5.093 r0 bottom
R4 "ERJ-1GEJ150C" RESC0603X26X15ML03T05 3.326,4.65 r90 top
R5 "ERJ-1GEJ150C" RESC0603X26X15ML03T05 12.477,4.65 r90 top
R6 "ERJ-1GEJ150C" RESC0603X26X15ML03T05 43.926,4.65 r90 top
R7 "ERJ-1GEJ150C" RESC0603X26X15ML03T05 54.946,4.65 r90 top
R8 "ERJ-1GEJ150C" RESC0603X26X15ML03T05 4.067,4.65 r90 top
R9 "ERJ-1GEJ150C" RESC0603X26X15ML03T05 13.225,4.65 r90 top
R10 "ERJ-1GEJ150C" RESC0603X26X15ML03T05 44.772,4.65 r90 top
R11 "ERJ-1GEJ150C" RESC0603X26X15ML03T05 55.741,4.65 r90 top
R12 "ERJ-1GEJ150C" RESC0603X26X15ML03T05 4.917,4.65 r90 top
R13 "ERJ-1GEJ150C" RESC0603X26X15ML03T05 14.053,4.65 r90 top
R14 "ERJ-1GEJ150C" RESC0603X26X15ML03T05 46.089,4.65 r90 top
R15 "ERJ-1GEJ150C" RESC0603X26X15ML03T05 56.51,4.65 r90 top
R16 "ERJ-1GEJ150C" RESC0603X26X15ML03T05 5.617,4.65 r90 top
R17 "ERJ-1GEJ150C" RESC0603X26X15ML03T05 14.753,4.65 r90 top
R18 "ERJ-1GEJ150C" RESC0603X26X15ML03T05 46.789,4.65 r90 top
R19 "ERJ-1GEJ150C" RESC0603X26X15ML03T05 57.21,4.65 r90 top
R20 "ERJ-1GEJ150C" RESC0603X26X15ML03T05 6.467,4.65 r90 top
R21 "ERJ-1GEJ150C" RESC0603X26X15ML03T05 15.532,4.65 r90 top
R22 "ERJ-1GEJ150C" RESC0603X26X15ML03T05 47.59,4.65 r90 top
R23 "ERJ-1GEJ150C" RESC0603X26X15ML03T05 58.393,4.65 r90 top
R24 "ERJ-1GEJ150C" RESC0603X26X15ML03T05 7.197,4.65 r90 top
R25 "ERJ-1GEJ150C" RESC0603X26X15ML03T05 16.3,4.65 r90 top
R26 "ERJ-1GEJ150C" RESC0603X26X15ML03T05 48.365,4.65 r90 top
R27 "ERJ-1GEJ150C" RESC0603X26X15ML03T05 59.161,4.65 r90 top
R28 "ERJ-1GEJ150C" RESC0603X26X15ML03T05 3.326,4.65 r90 bottom
R29 "ERJ-1GEJ150C" RESC0603X26X15ML03T05 12.395,4.65 r90 bottom
R30 "ERJ-1GEJ150C" RESC0603X26X15ML03T05 44.429,4.65 r90 bottom
R31 "ERJ-1GEJ150C" RESC0603X26X15ML03T05 54.958,4.65 r90 bottom
R32 "ERJ-1GEJ150C" RESC0603X26X15ML03T05 4.056,4.65 r90 bottom
R33 "ERJ-1GEJ150C" RESC0603X26X15ML03T05 13.177,4.65 r90 bottom
R34 "ERJ-1GEJ150C" RESC0603X26X15ML03T05 45.205,4.65 r90 bottom
R35 "ERJ-1GEJ150C" RESC0603X26X15ML03T05 55.778,4.65 r90 bottom
R36 "ERJ-1GEJ150C" RESC0603X26X15ML03T05 4.948,4.65 r90 bottom
R37 "ERJ-1GEJ150C" RESC0603X26X15ML03T05 14.166,4.65 r90 bottom
R38 "ERJ-1GEJ150C" RESC0603X26X15ML03T05 46.517,4.65 r90 bottom
R39 "ERJ-1GEJ150C" RESC0603X26X15ML03T05 57.105,4.65 r90 bottom
R40 "ERJ-1GEJ150C" RESC0603X26X15ML03T05 6.1,4.65 r90 bottom
R41 "ERJ-1GEJ150C" RESC0603X26X15ML03T05 15.3,4.65 r90 bottom
R42 "ERJ-1GEJ150C" RESC0603X26X15ML03T05 47.361,4.65 r90 bottom
R43 "ERJ-1GEJ150C" RESC0603X26X15ML03T05 58.002,4.65 r90 bottom
R44 "ERJ-1GEJ150C" RESC0603X26X15ML03T05 6.891,4.65 r90 bottom
R45 "ERJ-1GEJ150C" RESC0603X26X15ML03T05 16.07,4.65 r90 bottom
R46 "ERJ-1GEJ150C" RESC0603X26X15ML03T05 48.111,4.65 r90 bottom
R47 "ERJ-1GEJ150C" RESC0603X26X15ML03T05 58.896,4.65 r90 bottom
R48 "ERJ-1GEJ150C" RESC0603X26X15ML03T05 8.163,4.65 r90 top
R49 "ERJ-1GEJ150C" RESC0603X26X15ML03T05 17.46,4.65 r90 top
R50 "ERJ-1GEJ150C" RESC0603X26X15ML03T05 49.177,4.65 r90 top
R51 "ERJ-1GEJ150C" RESC0603X26X15ML03T05 60.169,4.65 r90 top
R52 "ERJ-1GEJ150C" RESC0603X26X15ML03T05 8.989,4.65 r90 top
R53 "ERJ-1GEJ150C" RESC0603X26X15ML03T05 18.199,4.65 r90 top
R54 "ERJ-1GEJ150C" RESC0603X26X15ML03T05 49.959,4.65 r90 top
R55 "ERJ-1GEJ150C" RESC0603X26X15ML03T05 60.989,4.65 r90 top
R56 "ERJ-1GEJ150C" RESC0603X26X15ML03T05 10.092,4.65 r90 top
R57 "ERJ-1GEJ150C" RESC0603X26X15ML03T05 19.438,4.65 r90 top
R58 "ERJ-1GEJ150C" RESC0603X26X15ML03T05 51.693,4.65 r90 top
R59 "ERJ-1GEJ150C" RESC0603X26X15ML03T05 61.829,4.65 r90 top
R60 "ERJ-1GEJ150C" RESC0603X26X15ML03T05 10.886,4.65 r90 top
R61 "ERJ-1GEJ150C" RESC0603X26X15ML03T05 20.268,4.65 r90 top
R62 "ERJ-1GEJ150C" RESC0603X26X15ML03T05 52.649,4.65 r90 top
R63 "ERJ-1GEJ150C" RESC0603X26X15ML03T05 62.775,4.65 r90 top
R64 "ERJ-1GEJ150C" RESC0603X26X15ML03T05 11.639,4.65 r90 top
R65 "ERJ-1GEJ150C" RESC0603X26X15ML03T05 21.038,4.65 r90 top
R66 "ERJ-1GEJ150C" RESC0603X26X15ML03T05 53.431,4.65 r90 top
R67 "ERJ-1GEJ150C" RESC0603X26X15ML03T05 63.545,4.65 r90 top
R68 "ERJ-1GEJ150C" RESC0603X26X15ML03T05 7.898,4.65 r90 bottom
R69 "ERJ-1GEJ150C" RESC0603X26X15ML03T05 16.957,4.65 r90 bottom
R70 "ERJ-1GEJ150C" RESC0603X26X15ML03T05 48.835,4.65 r90 bottom
R71 "ERJ-1GEJ150C" RESC0603X26X15ML03T05 59.912,4.65 r90 bottom
R72 "ERJ-1GEJ150C" RESC0603X26X15ML03T05 8.611,4.65 r90 bottom
R73 "ERJ-1GEJ150C" RESC0603X26X15ML03T05 17.724,4.65 r90 bottom
R74 "ERJ-1GEJ150C" RESC0603X26X15ML03T05 49.771,4.65 r90 bottom
R75 "ERJ-1GEJ150C" RESC0603X26X15ML03T05 60.643,4.65 r90 bottom
R76 "ERJ-1GEJ150C" RESC0603X26X15ML03T05 9.446,4.65 r90 bottom
R77 "ERJ-1GEJ150C" RESC0603X26X15ML03T05 18.539,4.65 r90 bottom
R78 "ERJ-1GEJ150C" RESC0603X26X15ML03T05 51.376,4.65 r90 bottom
R79 "ERJ-1GEJ150C" RESC0603X26X15ML03T05 61.495,4.65 r90 bottom
R80 "RC0402JR-0730RL" RESC1005X40X25NL5T10 64.657,11.777 r0 bottom
R81 "ERJ-1GEJ150C" RESC0603X26X15ML03T05 10.146,4.65 r90 bottom
R82 "ERJ-1GEJ150C" RESC0603X26X15ML03T05 19.239,4.65 r90 bottom
R83 "ERJ-1GEJ150C" RESC0603X26X15ML03T05 52.076,4.65 r90 bottom
R84 "ERJ-1GEJ150C" RESC0603X26X15ML03T05 62.195,4.65 r90 bottom
R85 "RC0402JR-0730RL" RESC1005X40X25NL5T10 64.657,12.763 r0 bottom
R86 "ERJ-1GEJ150C" RESC0603X26X15ML03T05 10.877,4.65 r90 bottom
R87 "ERJ-1GEJ150C" RESC0603X26X15ML03T05 20.269,4.65 r90 bottom
R88 "ERJ-1GEJ150C" RESC0603X26X15ML03T05 53.133,4.65 r90 bottom
R89 "ERJ-1GEJ150C" RESC0603X26X15ML03T05 62.927,4.65 r90 bottom
R90 "ERJ-1GEJ150C" RESC0603X26X15ML03T05 11.59,4.65 r90 bottom
R91 "ERJ-1GEJ150C" RESC0603X26X15ML03T05 20.987,4.65 r90 bottom
R92 "ERJ-1GEJ150C" RESC0603X26X15ML03T05 54.006,4.65 r90 bottom
R93 "ERJ-1GEJ150C" RESC0603X26X15ML03T05 63.658,4.65 r90 bottom
R94 "ERJ-2GEJ241x" RESC1005X40X25ML05T05 4.428,8.779 r90 top
R95 "ERJ-2GEJ241x" RESC1005X40X25ML05T05 14.918,8.779 r90 bottom
R96 "ERJ-2GEJ241x" RESC1005X40X25ML05T05 14.918,8.779 r90 top
R97 "ERJ-2GEJ241x" RESC1005X40X25ML05T05 25.408,8.779 r90 bottom
R98 "ERJ-2GEJ241x" RESC1005X40X25ML05T05 40.958,8.779 r90 top
R99 "ERJ-2GEJ241x" RESC1005X40X25ML05T05 51.448,8.779 r90 bottom
R100 "ERJ-2GEJ241x" RESC1005X40X25ML05T05 51.448,8.779 r90 top
R101 "ERJ-2GEJ241x" RESC1005X40X25ML05T05 61.938,8.779 r90 bottom
RN1 "CAY10-360J4LF" BOUR-CAY10-J4_V 64.657,12.217 r0 top
RN2 "CAY10-360J4LF" BOUR-CAY10-J4_V 64.657,19.249 r0 top
RN3 "CAY10-360J4LF" BOUR-CAY10-J4_V 64.657,15.787 r0 top
RN4 "CAY10-360J4LF" BOUR-CAY10-J4_V 64.657,15.787 r0 bottom
RN5 "CAY10-360J4LF" BOUR-CAY10-J4_V 64.657,19.249 r0 bottom
RN6 "CAY10-360J4LF" BOUR-CAY10-J4_V 64.657,22.999 r0 bottom
RN7 "CAY10-360J4LF" BOUR-CAY10-J4_V 64.657,22.999 r0 top
U1 "MT40A1G8WE-083E:B" MICT-WE-78 9.673,14.517 r180 top locked (schematic designator D2)
U2 "MT40A1G8WE-083E:B" MICT-WE-78 20.163,14.517 r180 top locked (schematic designator D4)
U3 "MT40A1G8WE-083E:B" MICT-WE-78 46.203,14.517 r180 top locked (schematic designator U1)
U4 "MT40A1G8WE-083E:B" MICT-WE-78 56.693,14.517 r180 top locked (schematic designator U3)
U5 "MT40A1G8WE-083E:B" MICT-WE-78 56.693,14.517 r0 bottom locked (schematic designator U4)
U6 "MT40A1G8WE-083E:B" MICT-WE-78 46.203,14.517 r0 bottom locked (schematic designator U2)
U7 "MT40A1G8WE-083E:B" MICT-WE-78 20.163,14.517 r0 bottom locked (schematic designator D5)
U8 "MT40A1G8WE-083E:B" MICT-WE-78 9.673,14.517 r0 bottom locked (schematic designator D3)
X1 "SODIMM-CN-2P-M-R260" SODIMM-GF-2D-500-1K-S260 0.825,1.365 r0 top

## Footprints (in the part's own frame and the unit in brackets; to place one, negate y for a bottom-side part, rotate by r counter-clockwise, add the part's x,y. Pads: shape width x height; smd on the part's side, far side on the other; paste and mask are expansions set on the pad)
BOUR-CAY10-J4_V [mm] "SMD, 8-Leads, Body 2x1mm, Pitch 0.5mm"
  rect 0.5x0.4 smd: 1(-0.5,0.75) 4(-0.5,-0.75) 5(0.5,-0.75) 8(0.5,0.75)
  rect 0.5x0.3 smd: 2(-0.5,0.25) 3(-0.5,-0.25) 6(0.5,-0.25) 7(0.5,0.25)
  silkscreen extent -1.2,0.7 -1.1,0.8, body extent -0.5,-1 0.5,1, height 0.35
CAPC1005X33X10LL5 [mm] "Chip Capacitor, 2-Leads, Body 1.05x0.55mm, IPC High Density"
  rect 0.32x0.52 smd: 1(-0.5,0) 2(0.5,0)
  body extent -0.53,-0.28 0.53,0.28, height 0.33
CAPC1005X55X10LL05 [mm] "Chip Capacitor, 2-Leads, Body 1.05x0.55mm, IPC High Density"
  rect 0.32x0.52 smd: 1(-0.5,0) 2(0.5,0)
  body extent -0.53,-0.28 0.53,0.28, height 0.55
CAPC1005X55X10NL05 [mm] "Chip Capacitor, 2-Leads, Body 1.05x0.55mm, IPC Medium Density"
  rect 0.42x0.62 smd: 1(-0.55,0) 2(0.55,0)
  body extent -0.53,-0.28 0.53,0.28, height 0.55
CAPC1005X55X25NL5T10 [mm] "Chip Capacitor, 2-Leads, Body 1.05x0.55mm, IPC Medium Density"
  rect 0.66x0.62 smd: 1(-0.44,0) 2(0.44,0)
  body extent -0.53,-0.28 0.53,0.28, height 0.55
CAPC1608X90X35ML10T15 [mm] "Chip Capacitor, 2-Leads, Body 1.7x0.9mm, IPC Low Density"
  rect 0.95x1.05 smd: 1(-0.725,0) 2(0.725,0)
  body extent -0.85,-0.45 0.85,0.45, height 0.9
MCHP-TDFN-MNY8_V [mm] "SON, , Body 3x2mm, Pitch 0.5mm"
  rect 0.75x0.3 smd: 1(-1.5,0.75) 2(-1.5,0.25) 3(-1.5,-0.25) 4(-1.5,-0.75) 5(1.5,-0.75) 6(1.5,-0.25) 7(1.5,0.25) 8(1.5,0.75)
  rect 1.36x1.46 smd: 9(0,0)
  silkscreen extent -2.55,0.63 -2.3,0.88, body extent -1.5,-1 1.5,1, height 0.8
MICT-WE-78 [mm] "BGA, 78-Leads, Body 8.00x12.00mm, Pitch 0.80mm"
  round 0.4 smd: A1(-3.2,4.8) A2(-2.4,4.8) A3(-1.6,4.8) A7(1.6,4.8) A8(2.4,4.8) A9(3.2,4.8) B1(-3.2,4) B2(-2.4,4) B3(-1.6,4) B7(1.6,4) B8(2.4,4) B9(3.2,4) C1(-3.2,3.2) C2(-2.4,3.2) C3(-1.6,3.2) C7(1.6,3.2) C8(2.4,3.2) C9(3.2,3.2) D1(-3.2,2.4) D2(-2.4,2.4) D3(-1.6,2.4) D7(1.6,2.4) D8(2.4,2.4) D9(3.2,2.4) E1(-3.2,1.6) E2(-2.4,1.6) E3(-1.6,1.6) E7(1.6,1.6) E8(2.4,1.6) E9(3.2,1.6) F1(-3.2,0.8) F2(-2.4,0.8) F3(-1.6,0.8) F7(1.6,0.8) F8(2.4,0.8) F9(3.2,0.8) G1(-3.2,0) G2(-2.4,0) G3(-1.6,0) G7(1.6,0) G8(2.4,0) G9(3.2,0) H1(-3.2,-0.8) H2(-2.4,-0.8) H3(-1.6,-0.8) H7(1.6,-0.8) H8(2.4,-0.8) H9(3.2,-0.8) J1(-3.2,-1.6) J2(-2.4,-1.6) J3(-1.6,-1.6) J7(1.6,-1.6) J8(2.4,-1.6) J9(3.2,-1.6) K1(-3.2,-2.4) K2(-2.4,-2.4) K3(-1.6,-2.4) K7(1.6,-2.4) K8(2.4,-2.4) K9(3.2,-2.4) L1(-3.2,-3.2) L2(-2.4,-3.2) L3(-1.6,-3.2) L7(1.6,-3.2) L8(2.4,-3.2) L9(3.2,-3.2) M1(-3.2,-4) M2(-2.4,-4) M3(-1.6,-4) M7(1.6,-4) M8(2.4,-4) M9(3.2,-4) N1(-3.2,-4.8) N2(-2.4,-4.8) N3(-1.6,-4.8) N7(1.6,-4.8) N8(2.4,-4.8) N9(3.2,-4.8)
  silkscreen extent -4.64,-6 4,6.18, body extent -4,-6 4,6, height 1.2
RESC0603X26X15ML03T05 [mm] "Chip Resistor, 2-Leads, Body 0.63x0.33mm, IPC Low Density"
  rrect1% 0.55x0.45 smd: 1(-0.375,0) 2(0.375,0)
  body extent -0.31,-0.16 0.32,0.17, height 0.26
RESC1005X40X25ML05T05 [mm] "Chip Resistor, 2-Leads, Body 1.05x0.55mm, IPC Low Density"
  rect 0.65x0.65 smd: 1(-0.5,0) 2(0.5,0)
  body extent -0.53,-0.28 0.53,0.28, height 0.4
RESC1005X40X25ML5T10 [mm] "Chip Resistor, 2-Leads, Body 1.05x0.55mm, IPC Low Density"
  rect 0.7x0.65 smd: 1(-0.475,0) 2(0.475,0)
  body extent -0.53,-0.28 0.53,0.28, height 0.4
RESC1005X40X25NL5T10 [mm] "Chip Resistor, 2-Leads, Body 1.05x0.55mm, IPC Medium Density"
  rect 0.6x0.55 smd: 1(-0.425,0) 2(0.425,0)
  body extent -0.53,-0.28 0.53,0.28, height 0.4
SODIMM-GF-2D-500-1K-S260 [mm] "Golden finger, SODIMM, Dual, Staggered, Pitch 0.5mm, 260-Position"
  rect 0.35x2.25 smd paste-0.75 mask+0.3: 1(0,0) 3(0.5,0) 5(1,0) 7(1.5,0) 9(2,0) 11(2.5,0) 13(3,0) 15(3.5,0) 17(4,0) 19(4.5,0) 21(5,0) 23(5.5,0) 25(6,0) 27(6.5,0) 29(7,0) 31(7.5,0) 33(8,0) 35(8.5,0) 37(9,0) 39(9.5,0) 41(10,0) 43(10.5,0) 45(11,0) 47(11.5,0) 49(12,0) 51(12.5,0) 53(13,0) 55(13.5,0) 57(14,0) 59(14.5,0) 61(15,0) 63(15.5,0) 65(16,0) 67(16.5,0) 69(17,0) 71(17.5,0) 73(18,0) 75(18.5,0) 77(19,0) 79(19.5,0) 81(20,0) 83(20.5,0) 85(21,0) 87(21.5,0) 89(22,0) 91(22.5,0) 93(23,0) 95(23.5,0) 97(24,0) 99(24.5,0) 101(25,0) 103(25.5,0) 105(26,0) 107(26.5,0) 109(27,0) 111(27.5,0) 113(28,0) 115(28.5,0) 117(29,0) 119(29.5,0) 121(30,0) 123(30.5,0) 125(31,0) 127(31.5,0) 129(32,0) 131(32.5,0) 133(33,0) 135(33.5,0) 137(34,0) 139(34.5,0) 141(35,0) 143(35.5,0) 145(38,0) 147(38.5,0) 149(39,0) 151(39.5,0) 153(40,0) 155(40.5,0) 157(41,0) 159(41.5,0) 161(42,0) 163(42.5,0) 165(43,0) 167(43.5,0) 169(44,0) 171(44.5,0) 173(45,0) 175(45.5,0) 177(46,0) 179(46.5,0) 181(47,0) 183(47.5,0) 185(48,0) 187(48.5,0) 189(49,0) 191(49.5,0) 193(50,0) 195(50.5,0) 197(51,0) 199(51.5,0) 201(52,0) 203(52.5,0) 205(53,0) 207(53.5,0) 209(54,0) 211(54.5,0) 213(55,0) 215(55.5,0) 217(56,0) 219(56.5,0) 221(57,0) 223(57.5,0) 225(58,0) 227(58.5,0) 229(59,0) 231(59.5,0) 233(60,0) 235(60.5,0) 237(61,0) 239(61.5,0) 241(62,0) 243(62.5,0) 245(63,0) 247(63.5,0) 249(64,0) 251(64.5,0) 253(65,0) 255(65.5,0) 257(66,0) 259(66.5,0)
  rect 0.35x2.25 smd far side paste-0.75 mask+0.3: 2(0.25,0) 4(0.75,0) 6(1.25,0) 8(1.75,0) 10(2.25,0) 12(2.75,0) 14(3.25,0) 16(3.75,0) 18(4.25,0) 20(4.75,0) 22(5.25,0) 24(5.75,0) 26(6.25,0) 28(6.75,0) 30(7.25,0) 32(7.75,0) 34(8.25,0) 36(8.75,0) 38(9.25,0) 40(9.75,0) 42(10.25,0) 44(10.75,0) 46(11.25,0) 48(11.75,0) 50(12.25,0) 52(12.75,0) 54(13.25,0) 56(13.75,0) 58(14.25,0) 60(14.75,0) 62(15.25,0) 64(15.75,0) 66(16.25,0) 68(16.75,0) 70(17.25,0) 72(17.75,0) 74(18.25,0) 76(18.75,0) 78(19.25,0) 80(19.75,0) 82(20.25,0) 84(20.75,0) 86(21.25,0) 88(21.75,0) 90(22.25,0) 92(22.75,0) 94(23.25,0) 96(23.75,0) 98(24.25,0) 100(24.75,0) 102(25.25,0) 104(25.75,0) 106(26.25,0) 108(26.75,0) 110(27.25,0) 112(27.75,0) 114(28.25,0) 116(28.75,0) 118(29.25,0) 120(29.75,0) 122(30.25,0) 124(30.75,0) 126(31.25,0) 128(31.75,0) 130(32.25,0) 132(32.75,0) 134(33.25,0) 136(33.75,0) 138(34.25,0) 140(34.75,0) 142(35.25,0) 144(35.75,0) 146(38.25,0) 148(38.75,0) 150(39.25,0) 152(39.75,0) 154(40.25,0) 156(40.75,0) 158(41.25,0) 160(41.75,0) 162(42.25,0) 164(42.75,0) 166(43.25,0) 168(43.75,0) 170(44.25,0) 172(44.75,0) 174(45.25,0) 176(45.75,0) 178(46.25,0) 180(46.75,0) 182(47.25,0) 184(47.75,0) 186(48.25,0) 188(48.75,0) 190(49.25,0) 192(49.75,0) 194(50.25,0) 196(50.75,0) 198(51.25,0) 200(51.75,0) 202(52.25,0) 204(52.75,0) 206(53.25,0) 208(53.75,0) 210(54.25,0) 212(54.75,0) 214(55.25,0) 216(55.75,0) 218(56.25,0) 220(56.75,0) 222(57.25,0) 224(57.75,0) 226(58.25,0) 228(58.75,0) 230(59.25,0) 232(59.75,0) 234(60.25,0) 236(60.75,0) 238(61.25,0) 240(61.75,0) 242(62.25,0) 244(62.75,0) 246(63.25,0) 248(63.75,0) 250(64.25,0) 252(64.75,0) 254(65.25,0) 256(65.75,0) 258(66.25,0) 260(66.75,0)

## Part data
C1: library part CMP-1663-00011-2, "Chip Capacitor, 100 pF, +/- 10%, 50 V, -55 to 125 degC, 0402 (1005 Metric), RoHS, Tape and Reel", Capacitance="100 pF", Case/Package=0402, Max Operating Temperature="125 degC", Min Operating Temperature="-55 degC", Package Quantity=10000, Tolerance=10%, Voltage Rating="50 V", ComponentLink1Description="Manufacturer URL", ComponentLink1URL=http://www.tdk.com/, ComponentLink2Description=Datasheet, ComponentLink2URL=http://datasheet.octopart.com/C-Series-Ceramic-Chip-Capacitors-TDK-datasheet-family-84.pdf, DatasheetVersion=04/2012, Mount="Surface Mount", Mounting Technology="Surface Mount", PackageDescription="2-Pin Surface Mount Device, Body 1 x 0.5 mm", Packaging="Tape and Reel", PartNumber=C1005C0G1H101K050BA, RoHSCompliant=true
C2 C5 C6 C7 C8 C9 C10 C11 C12: library part CMP-1663-00009-2, "Chip Capacitor, 0.1 uF, +/- 20%, 25 V, -55 to 125 degC, 0402 (1005 Metric), RoHS, Tape and Reel", Capacitance="100 nF", Case\/Package=0402, Case Code (Metric)=1005, Max Operating Temperature="125 degC", Min Operating Temperature="-55 degC", Package Quantity=10000, Tolerance=20%, Type (Capacitors)=X7R, Voltage Rating="25 V", Case Code (Imperial)=0402, ComponentLink1Description="Manufacturer URL", ComponentLink1URL=http://www.tdk.com/, ComponentLink2Description=Datasheet, ComponentLink2URL=http://www.farnell.com/datasheets/1571323.pdf, DatasheetVersion=09/2011, Height="0.5 mm", Length="1 mm", Mount="Surface Mount", Mounting Technology="Surface Mount", PackageDescription="2-Pin Surface Mount Device, Body 1 x 0.5 mm", PackageReference=0402, Packaging="Tape and Reel", PartNumber=C1005X7R1E104M, Pins=2, RoHSCompliant=true, Voltage Rating (DC)="25 V", Width="0.5 mm"
C3: library part CMP-2008-04352-2, "Chip Capacitor, 3.3 pF, +/- 0.25 pF, 50 V, -55 to 125 degC, 0402 (1005 Metric), RoHS, Tape and Reel", Capacitance="3.3 pF", Case/Package=0402, Case Code (Metric)=1005, Max Operating Temperature="125 degC", Min Operating Temperature="-55 degC", Package Quantity=10000, Type (Capacitors)=C0G, Voltage Rating="50 V", Case Code (Imperial)=0402, ComponentLink1Description="Manufacturer URL", ComponentLink1URL=http://www.murata.com/, ComponentLink2Description=Datasheet, ComponentLink2URL=http://search.murata.co.jp/Ceramy/image/img/A01X/G101/ENG/GRM1555C1H3R3CA01-01.pdf, DatasheetVersion=03/2016, Height="0.5 mm", Length="0.039 inch", Mount="Surface Mount", Mounting Technology="Surface Mount", PackageDescription="2-Pin Surface Mount Device, Body 1 x 0.5 mm", Packaging="Tape and Reel", PartNumber=GRM1555C1H3R3CA01D, Radiation Hardening=No, REACH SVHC="No SVHC", RoHSCompliant=true, Voltage Rating (DC)="50 V", Width="0.02 inch"
C4: library part CMP-1663-00012-1, "Chip Capacitor, 10 nF, +/- 15%, 25 V, -55 to 125 degC, 0402 (1005 Metric), RoHS, Tape and Reel", Capacitance="10 nF", Case/Package=0402, Case Code (Metric)=1005, Max Operating Temperature="125 degC", Min Operating Temperature="-55 degC", Package Quantity=10000, Tolerance=20%, Type (Capacitors)=X7R, Voltage Rating="25 V", Case Code (Imperial)=0402, ComponentLink1Description="Manufacturer URL", ComponentLink1URL=http://www.tdk.com/, ComponentLink2Description=Datasheet, ComponentLink2URL=https://ciiva.com/datasheet-click-20389836?src=ciiva&sig=78734acc, DatasheetVersion=03/2015, Height="0.5 mm", Length="1 mm", Mount="Surface Mount", Mounting Technology="Surface Mount", PackageDescription="2-Pin Surface Mount Device, Body 1 x 0.5 mm", Packaging="Tape and Reel", PartNumber=C1005X7R1E103M050BB, RoHSCompliant=true, Voltage Rating (DC)="25 V", Width="0.5 mm"
C13 C14 C15 C16 C17 C18 C19 C20 C21 C22 C30 C31 C32 C33 C34 C35 C36 C37 C38 C39 C56 C57: library part CMP-2006-02799-2, "Chip Capacitor, 4.7 uF, +/- 10%, 6.3 V, -55 to 85 degC, 0603 (1608 Metric), RoHS, Tape and Reel", Capacitance="4.7 uF", Case/Package=0603, Case Code (Metric)=1608, Max Operating Temperature="85 degC", Min Operating Temperature="-55 degC", Package Quantity=4000, Tolerance=10%, Type (Capacitors)=X5R, Voltage Rating="6.3 V", Voltage Rating (DC)="3 V", Case Code (Imperial)=0603, ComponentLink1Description="Manufacturer URL", ComponentLink1URL=http://www.murata.com/, ComponentLink2Description=Datasheet, ComponentLink2URL=http://psearch.en.murata.com/capacitor/product/GRM188R60J475KE19%23.pdf, DatasheetVersion=08/2016, Height="0.8 mm", Length="1.6 mm", Mount="Surface Mount", Mounting Technology="Surface Mount", PackageDescription="2-Pin Surface Mount Device, Body 1.6 x 0.8 mm", Packaging="Tape and Reel", PartNumber=GRM188R60J475KE19D, Radiation Hardening=No, REACH SVHC="No SVHC", RoHSCompliant=true, Width="0.8 mm"
C23 C24 C25 C26 C27 C28 C29 C40 C41 C42 C43 C44 C45 C46 C47 C48 C49 C50 C51 C52 C53 C54 C55 C58 C59 C60 C61 C62 C63 C64 C65 C66 C67 C68 C69 C70 C71 C72 C73 C74 C75 C76 C77 C78 C79 C80 C81: library part CMP-1663-00006-2, "Chip Capacitor, 1 uF, +/- 10%, 25 V, -55 to 85 degC, 0402 (1005 Metric), RoHS, Tape and Reel", Capacitance="1 uF", Case/Package=0402, Case Code (Metric)=1005, Max Operating Temperature="85 degC", Min Operating Temperature="-55 degC", Package Quantity=1, Tolerance=10%, Case Code (Imperial)=0402, ComponentLink1Description="Manufacturer URL", ComponentLink1URL=http://www.tdk.com/, ComponentLink2Description=Datasheet, ComponentLink2URL=https://product.tdk.com/info/en/catalog/datasheets/mlcc_commercial_lowprofile_en.pdf, DatasheetVersion=04/2015, Length="0.039 inch", Mounting Technology="Surface Mount", PackageDescription="2-Pin Surface Mount Device, Body 1 x 0.5 mm", Packaging="Tape and Reel", PartNumber=CGB2A1X5R1E105K033BC, RoHSCompliant=True, Width="0.02 inch"
D1: library part CMP-1721-00006-1, "DDR4 DIMM Temperature Sensor with EEPROM for SPD, 1.7 to 3.6 V, -65 to 150 degC, 8-PinTDFN, Pb-free, Tape and Reel", ComponentLink1Description="Manufacturer URL", ComponentLink1URL=http://www.microchip.com/, ComponentLink2Description=Datasheet, ComponentLink2URL=http://ww1.microchip.com/downloads/en/DeviceDoc/22327C.pdf, DatasheetVersion="Rev. C, 05/2013", Mounting Technology="Surface Mount", PackageDescription="8-Pin Thin Dual Flat No-lead Package, Body 2 x 3 mm, Pitch 0.5 mm", PartNumber=MCP98244
R1: library part CMP-2002-07920-2, "Chip Resistor, 120 Ohm, +/- 5%, 0.063 W, -55 to 155 degC, 0402 (1005 Metric), RoHS, Tape and Reel", Case/Package=0402, Case Code (Metric)=1005, Max Operating Temperature="155 degC", Min Operating Temperature="-55 degC", Package Quantity=10000, Power Rating="63 mW", Resistance="120 Ohm", Tolerance=5%, Type (Resistor)="Thick Film", Voltage Rating="50 V", Case Code (Imperial)=0402, ComponentLink1Description="Manufacturer URL", ComponentLink1URL=http://www.yageo.com/, ComponentLink2Description=Datasheet, ComponentLink2URL=http://www.yageo.com/documents/recent/PYu-RC_Group_51_RoHS_L_04.pdf, DatasheetVersion="Rev. 4, 02/2016", Height="0.35 mm", Length="1 mm", Mount="Surface Mount", Mounting Technology="Surface Mount", PackageDescription="2-Pin Surface Mount Device, Body 1 x 0.5 mm", Packaging="Tape and Reel", PartNumber=RC0402JR-07120RL, Pins=2, REACH SVHC="No SVHC", RoHSCompliant=true, Voltage Rating (DC)="50 V", Width="0.5 mm"
R2: library part CMP-2002-07994-2, "Chip Resistor, 39 Ohm, +/- 5%, 0.063 W, -55 to 155 degC, 0402 (1005 Metric), RoHS, Tape and Reel", Case/Package=0402, Case Code (Metric)=1005, Max Operating Temperature="155 degC", Min Operating Temperature="-55 degC", Package Quantity=1, Power Rating="63 mW", Resistance="39 Ohm", Tolerance=5%, Voltage Rating="50 V", Case Code (Imperial)=0402, ComponentLink1Description="Manufacturer URL", ComponentLink1URL=http://www.yageo.com/, ComponentLink2Description=Datasheet, ComponentLink2URL=http://www.yageo.com/documents/recent/PYu-RC_Group_51_RoHS_L_04.pdf, DatasheetVersion="Rev. 4, 02/2016", Height="0.35 mm", Length="1 mm", Mount="Surface Mount", Mounting Technology="Surface Mount", PackageDescription="2-Pin Surface Mount Device, Body 1 x 0.5 mm", Packaging="Cut Tape", PartNumber=RC0402JR-0739RL, Pins=2, REACH SVHC="No SVHC", RoHSCompliant=true, Voltage Rating (DC)="50 V", Width="0.5 mm"
R3: library part CMP-2002-00578-3, "Chip Resistor, 75 Ohm, +/- 5%, 100 mW, -55 to 155 degC, 0402 (1005 Metric), RoHS, Tape and Reel", Case\/Package=0402, Case Code (Metric)=1005, Manufacturer="Basic Passives", Max Operating Temperature="155 degC", Min Operating Temperature="-55 degC", Package Quantity=10000, Power Rating="100 mW", Resistance="75 Ohm", Tolerance=5%, Voltage Rating="50 V", Case Code (Imperial)=0402, ComponentLink1Description="Manufacturer URL", ComponentLink1URL=http://www.panasonic.com/, ComponentLink2Description=Datasheet, ComponentLink2URL=http://industrial.panasonic.com/cdbs/www-data/pdf/RDA0000/AOA0000C84.pdf, DatasheetVersion=03/2015, Height="0.35 mm", Length="1 mm", Mount="Surface Mount", Mounting Technology="Surface Mount", PackageDescription="2-Pin Surface Mount Device, Body 1 x 0.5 mm", PackageReference=0402, Packaging="Tape and Reel", PartNumber=ERJ-2GEJ750X, Pins=2, Radiation Hardening=No, REACH SVHC=Unknown, RoHSCompliant=true, Width="0.5 mm"
R4 R5 R6 R7 R8 R9 R10 R11 R12 R13 R14 R15 R16 R17 R18 R19 R20 R21 R22 R23 R24 R25 R26 R27 R28 R29 R30 R31 R32 R33 R34 R35 R36 R37 R38 R39 R40 R41 R42 R43 R44 R45 R46 R47 R48 R49 R50 R51 R52 R53 R54 R55 R56 R57 R58 R59 R60 R61 R62 R63 R64 R65 R66 R67 R68 R69 R70 R71 R72 R73 R74 R75 R76 R77 R78 R79 R81 R82 R83 R84 R86 R87 R88 R89 R90 R91 R92 R93: library part CMP-2004-03155-3, "Chip Resistor, 15 Ohm, +/- 5%, 0.05 W, -55 to 125 degC, 0201 (0603 Metric), RoHS, Tape and Reel", Case/Package=0201, Case Code (Metric)=0603, Max Operating Temperature="125 degC", Min Operating Temperature="-55 degC", Package Quantity=15000, Power Rating="50 mW", Resistance="15 Ohm", Tolerance=5%, Voltage Rating="25 V", Case Code (Imperial)=0201, ComponentLink1Description="Manufacturer URL", ComponentLink1URL=http://www.panasonic.com/, ComponentLink2Description=Datasheet, ComponentLink2URL=http://media.digikey.com/pdf/Data%20Sheets/Panasonic%20Resistors%20Thermistors%20PDFs/ERJ%205%25.pdf, DatasheetVersion=03/2005, Height="0.23 mm", Length="0.6 mm", Mounting Technology="Surface Mount", PackageDescription="2-Pin Surface Mount Device, Body 0.6 x 0.3 mm", Packaging="Tape and Reel", PartNumber=ERJ-1GEJ150C, RoHSCompliant=true, Width="0.3 mm"
R80 R85: library part CMP-2002-07983-2, "Chip Resistor, 30 Ohm, +/- 5%, 0.063 W, -55 to 155 degC, 0402 (1005 Metric), RoHS, Tape and Reel", Case/Package=0402, Case Code (Metric)=1005, Max Operating Temperature="155 degC", Min Operating Temperature="-55 degC", Package Quantity=10000, Power Rating="63 mW", Resistance="30 Ohm", Tolerance=5%, Voltage Rating="50 V", Case Code (Imperial)=0402, ComponentLink1Description="Manufacturer URL", ComponentLink1URL=http://www.yageo.com/, ComponentLink2Description=Datasheet, ComponentLink2URL=http://www.yageo.com/documents/recent/PYu-RC_Group_51_RoHS_L_04.pdf, DatasheetVersion="Rev. 4, 02/2016", Height="0.35 mm", Length="1 mm", Mount="Surface Mount", Mounting Technology="Surface Mount", PackageDescription="2-Pin Surface Mount Device, Body 1 x 0.5 mm", Packaging="Tape and Reel", PartNumber=RC0402JR-0730RL, Radiation Hardening=No, RoHSCompliant=true, Width="0.5 mm"
R94 R95 R96 R97 R98 R99 R100 R101: library part CMP-2002-00493-3, "Chip Resistor, 240 Ohm, +/- 5%, 100 mW, -55 to 155 degC, 0402 (1005 Metric), RoHS, Tape and Reel", Case\/Package=0402, Case Code (Metric)=1005, Manufacturer="Basic Passives", Max Operating Temperature="155 degC", Min Operating Temperature="-55 degC", Package Quantity=10000, Power Rating="100 mW", Resistance="240 Ohm", Tolerance=5%, Voltage Rating="50 V", Case Code (Imperial)=0402, ComponentLink1Description="Manufacturer URL", ComponentLink1URL=http://www.panasonic.com/, ComponentLink2Description=Datasheet, ComponentLink2URL=http://industrial.panasonic.com/cdbs/www-data/pdf/RDA0000/AOA0000C84.pdf, DatasheetVersion=03/2015, Height="0.35 mm", Length="1 mm", Mount="Surface Mount", Mounting Technology="Surface Mount", PackageDescription="2-Pin Surface Mount Device, Body 1 x 0.5 mm", PackageReference=0402, Packaging="Tape and Reel", PartNumber=ERJ-2GEJ241x, Pins=2, Radiation Hardening=No, REACH SVHC=Yes, RoHSCompliant=true, Width="0.5 mm"